# Altium PCB analogtestboard3.PCBDOC (part 1 of 3)
Units mil, origin at the board's own origin, x right, y up, seen from the top; angles counter-clockwise.
Board outline 10000 x 10000 mil, 4 copper layers (Top Layer, Internal Plane 1, Internal Plane 2, Bottom Layer); 448 components, 227 nets, 1474 pads, 451 vias.
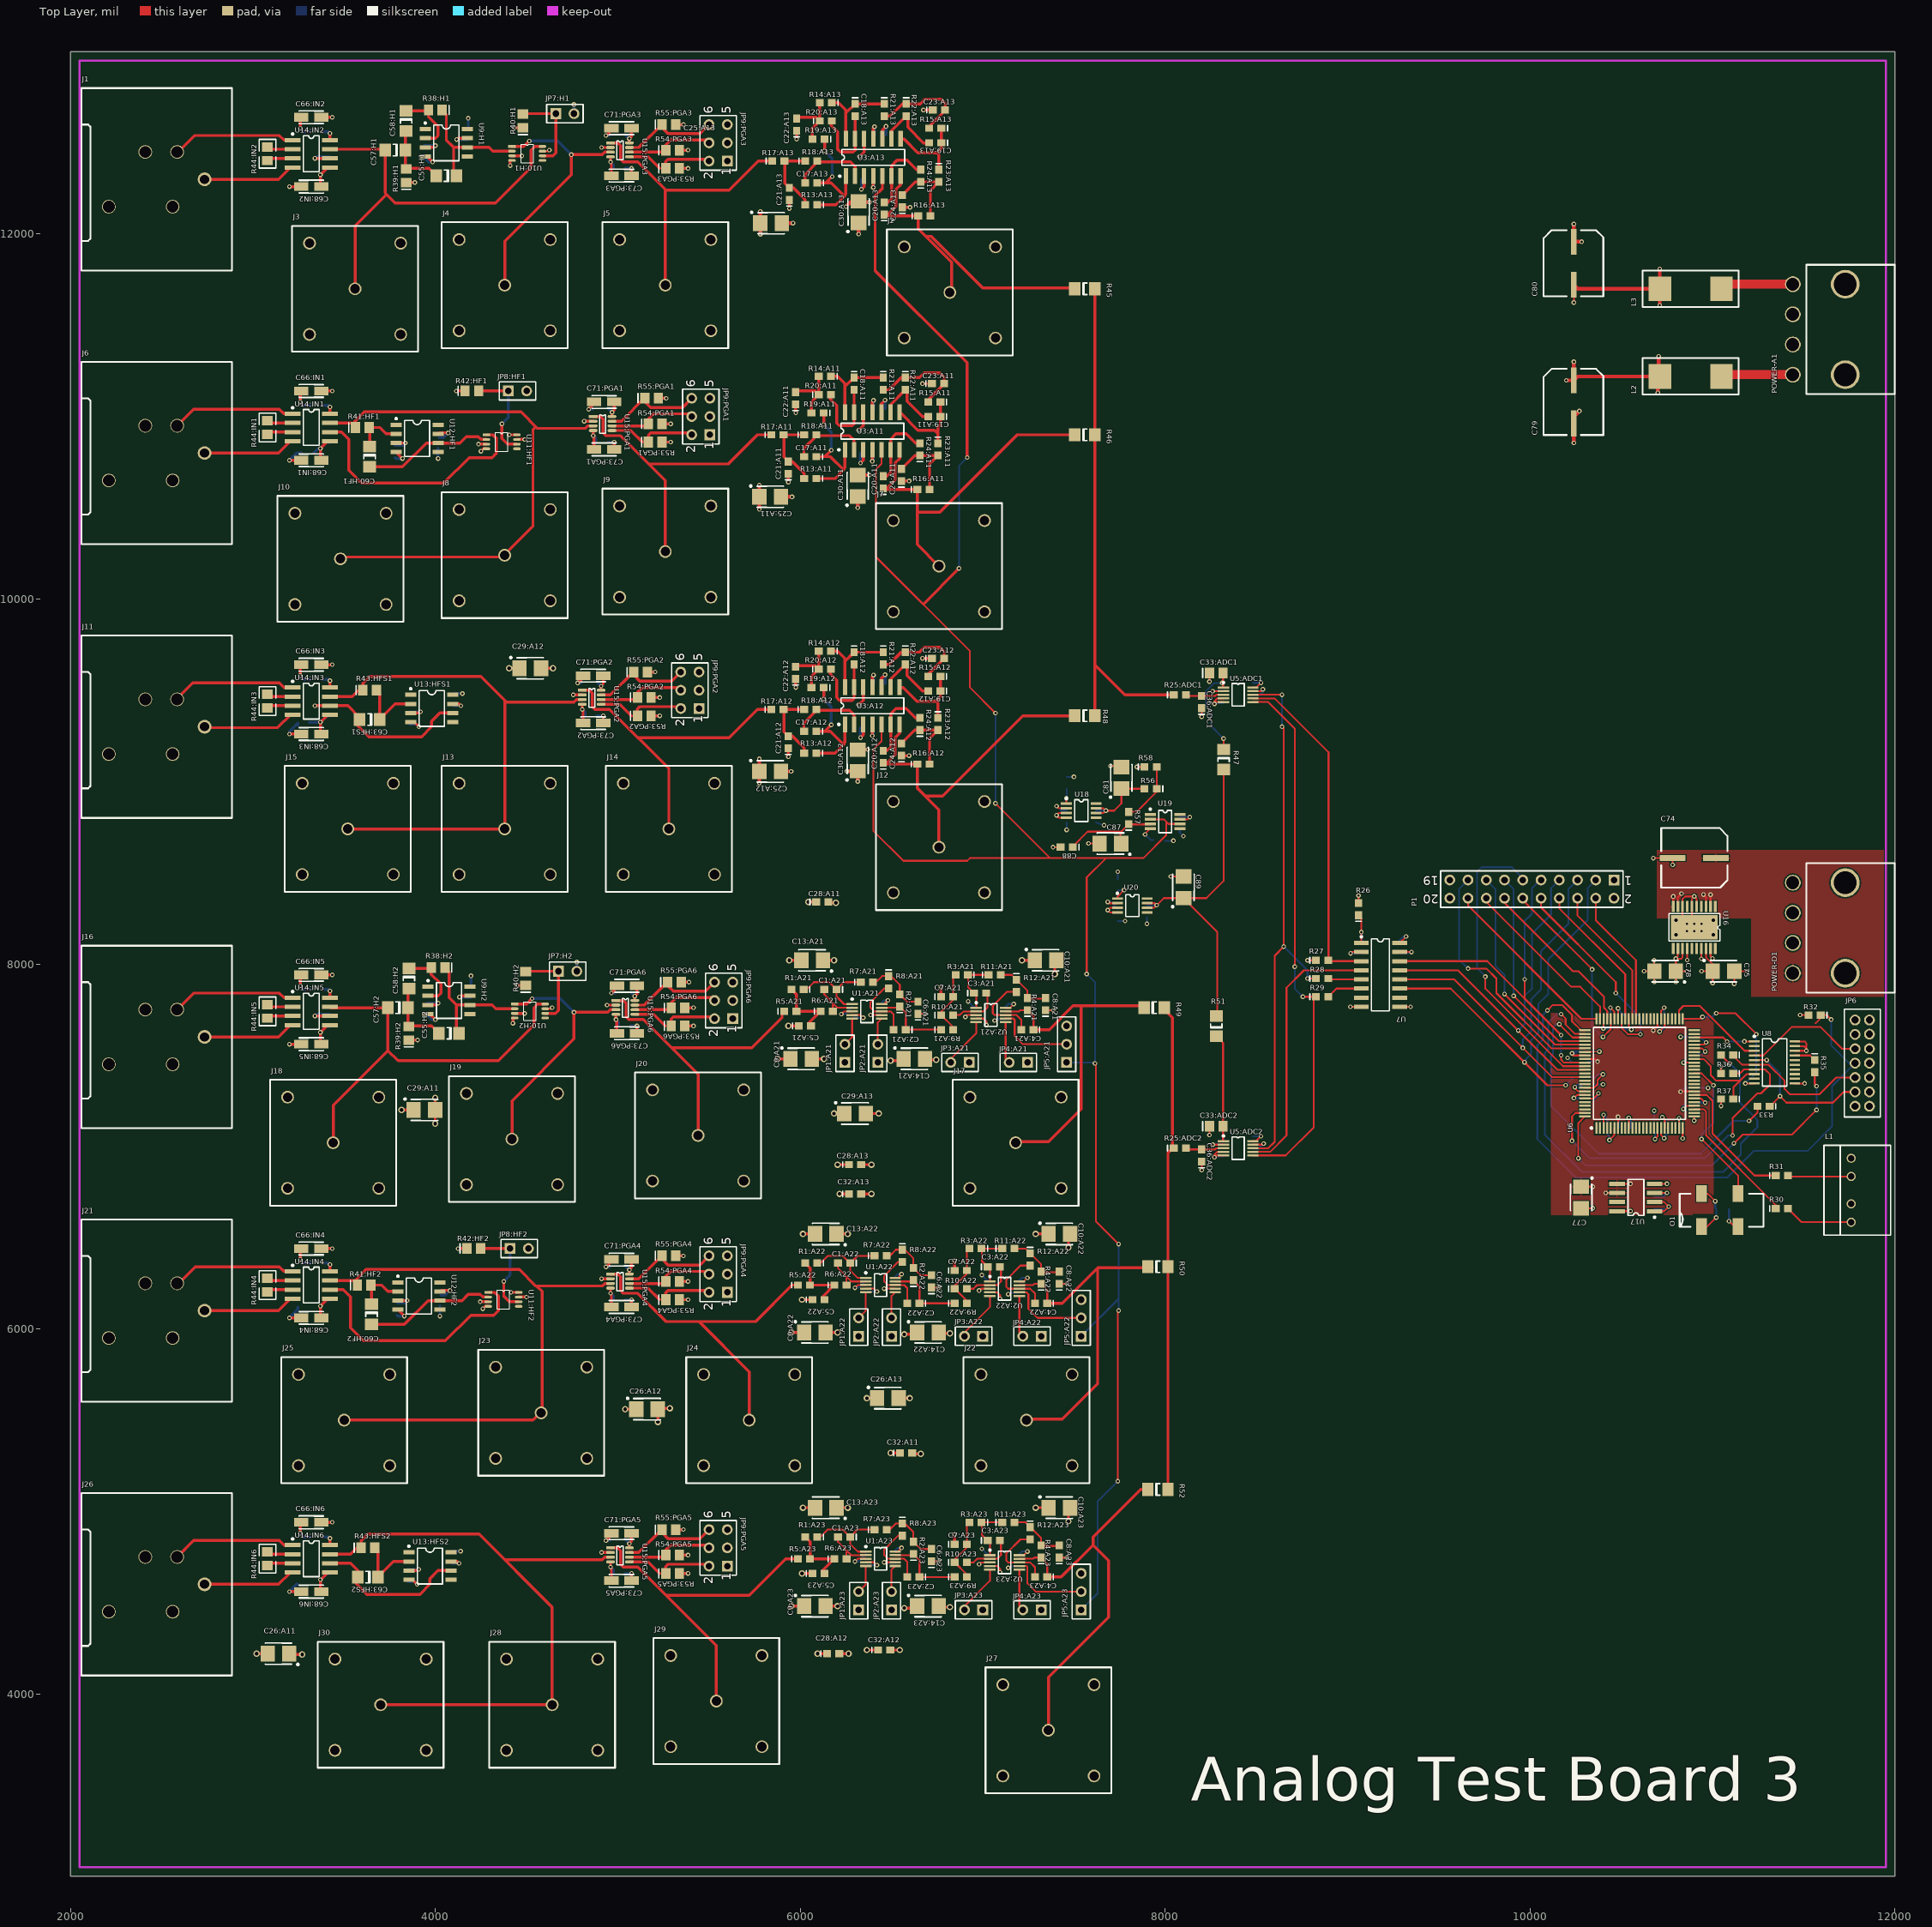
[diagram p0: Top Layer view]
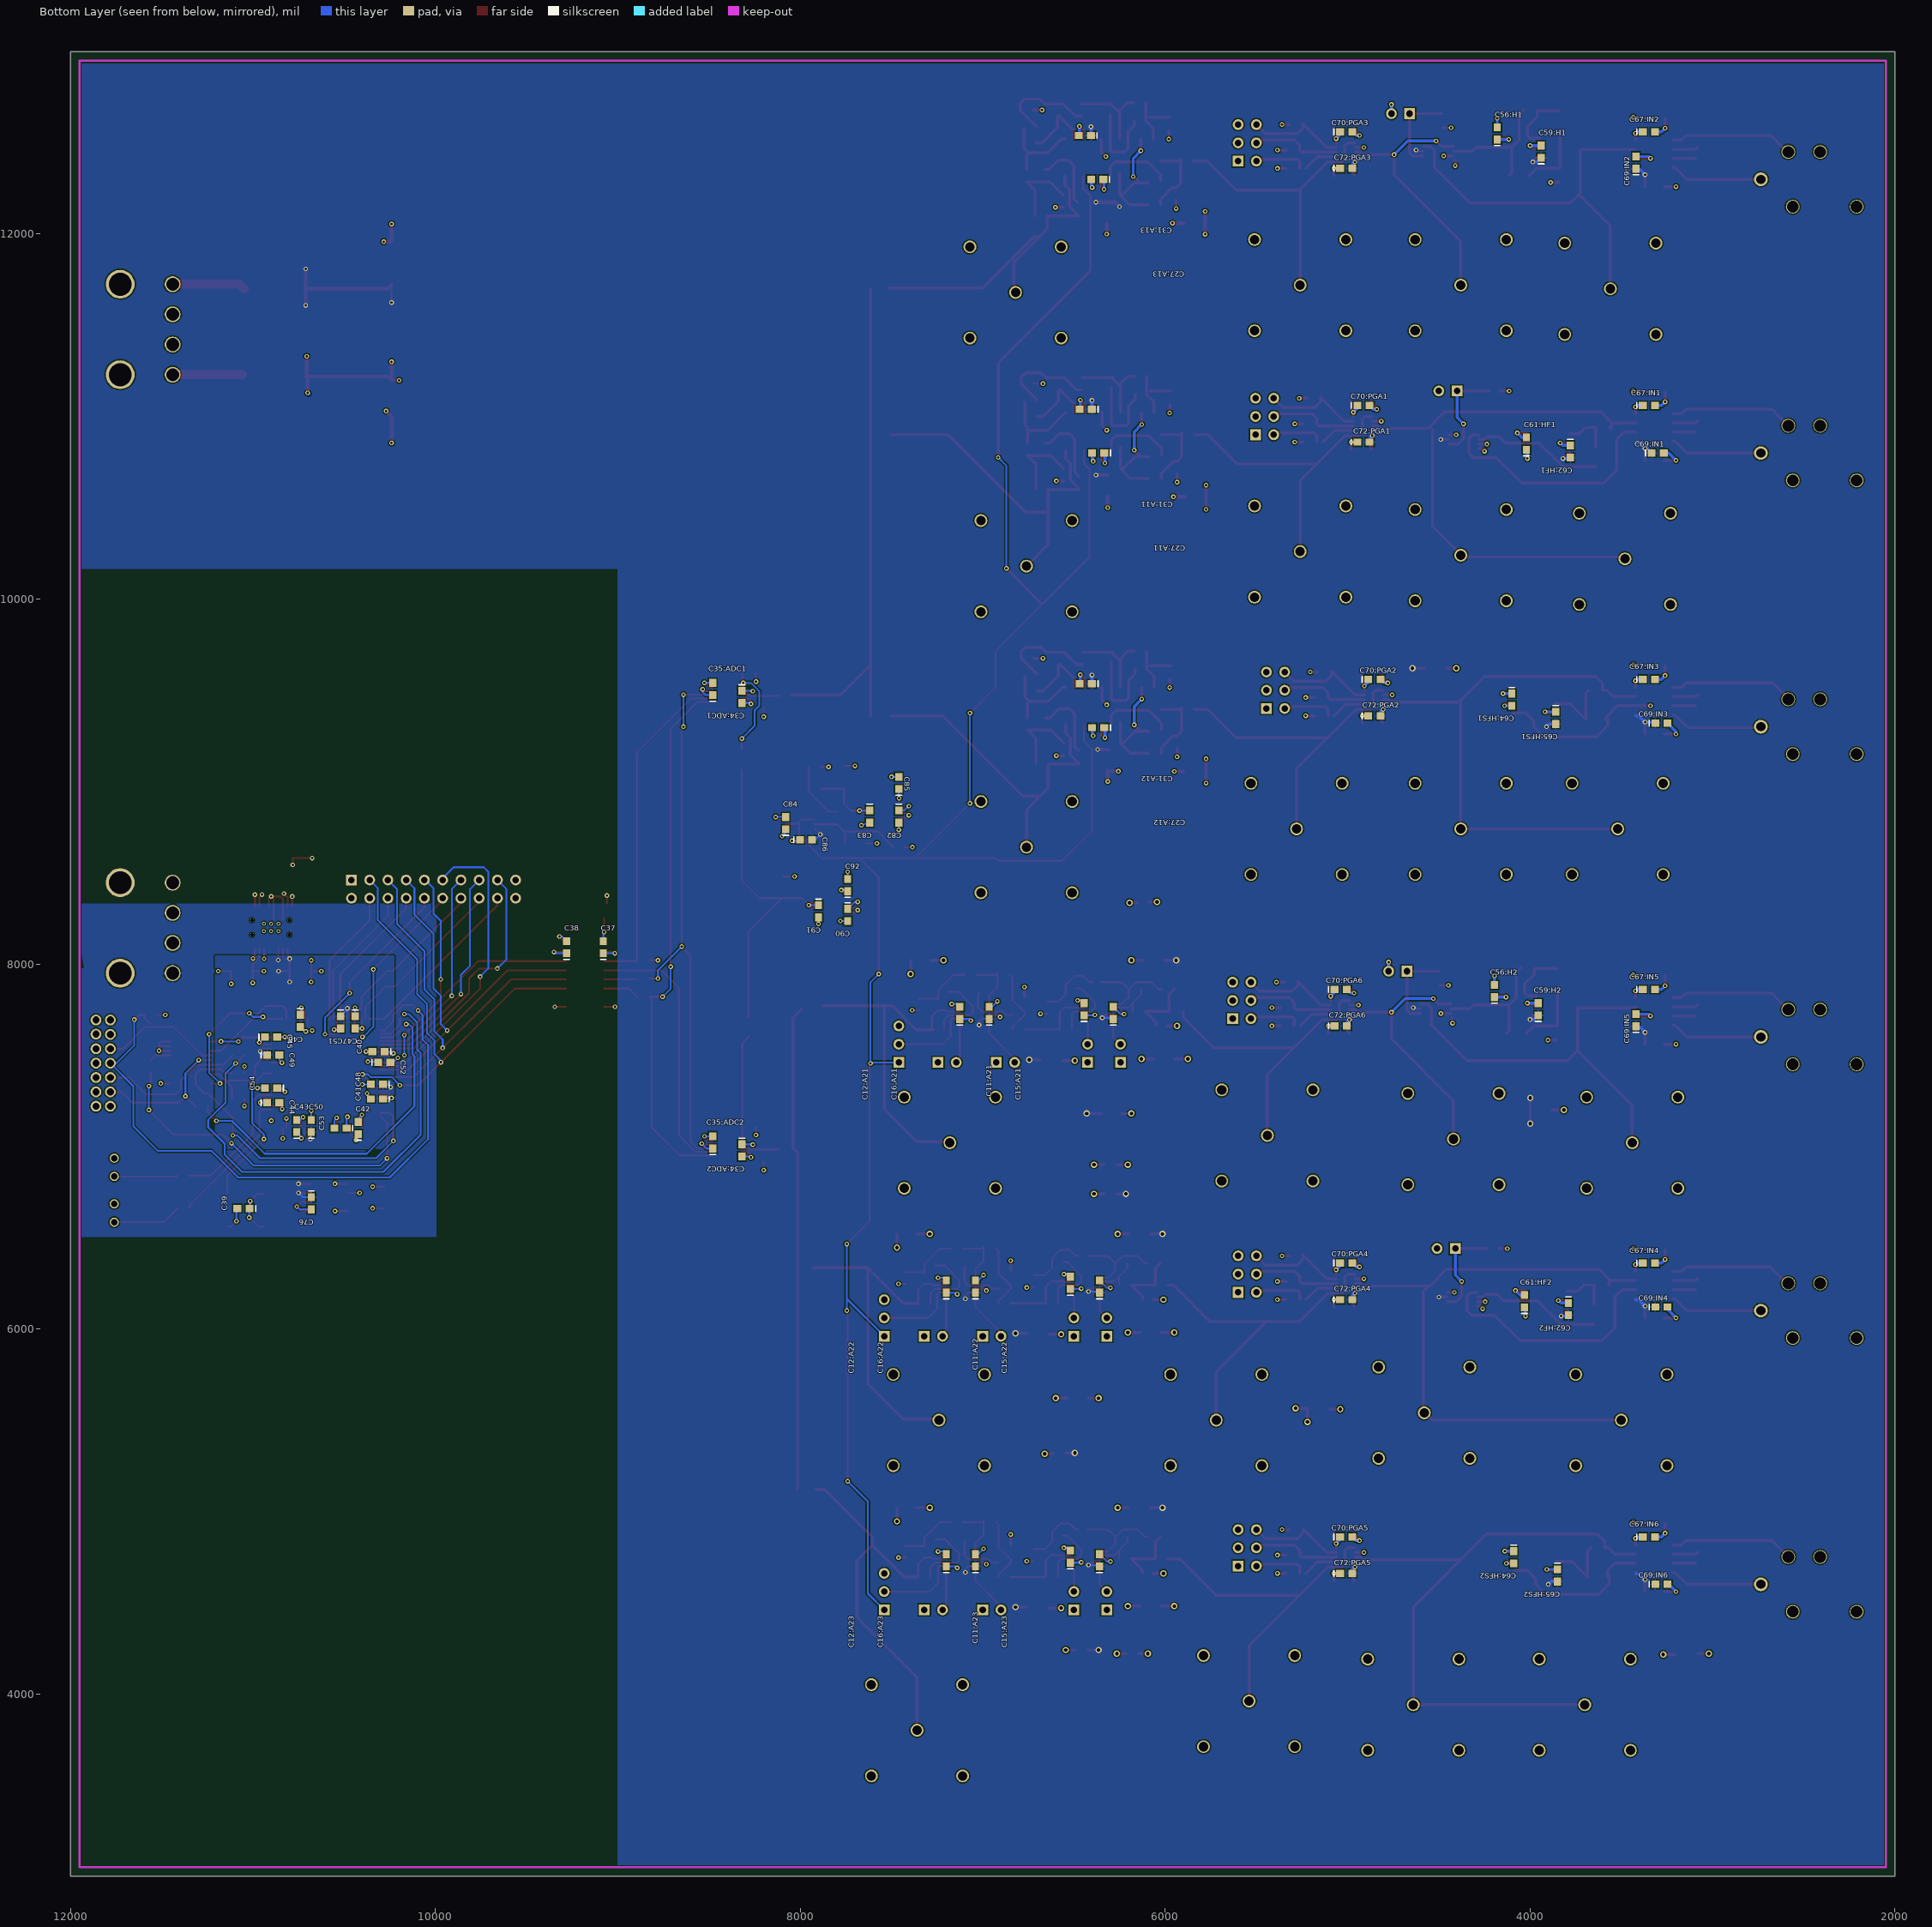
[diagram p1: Bottom Layer view, seen from below]
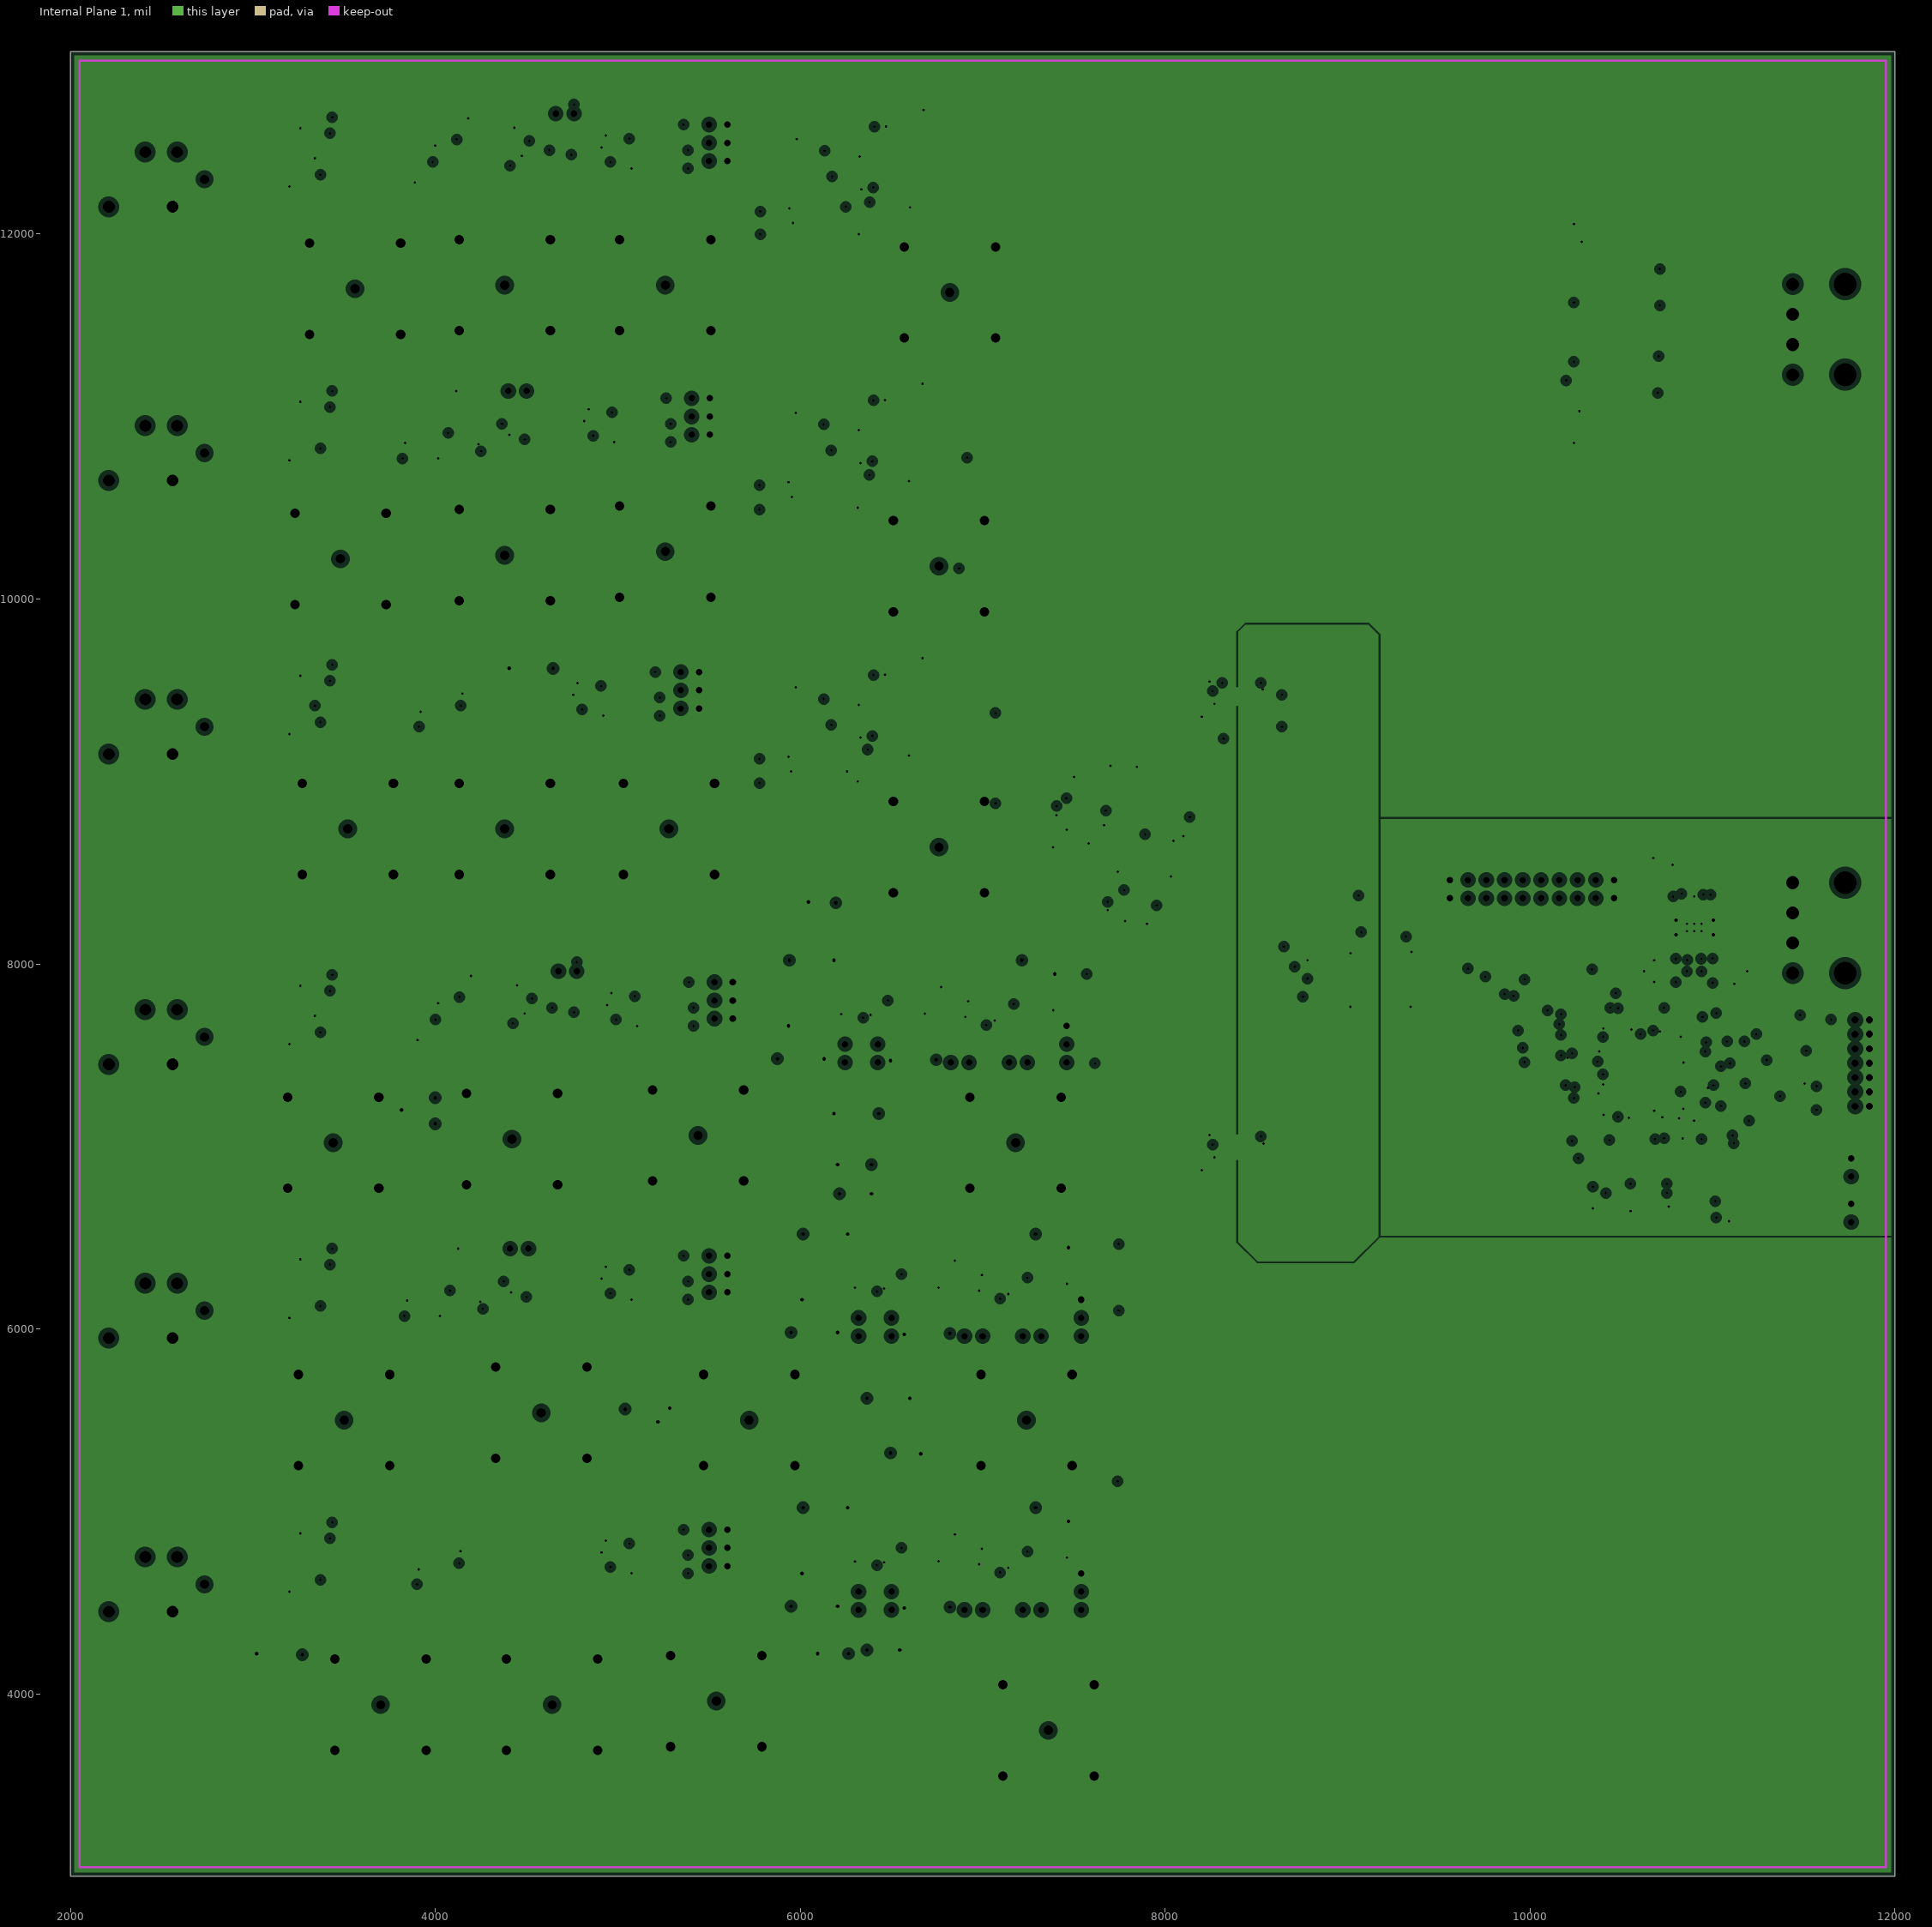
[diagram p2: Internal Plane 1, clearances drawn from the general rule]
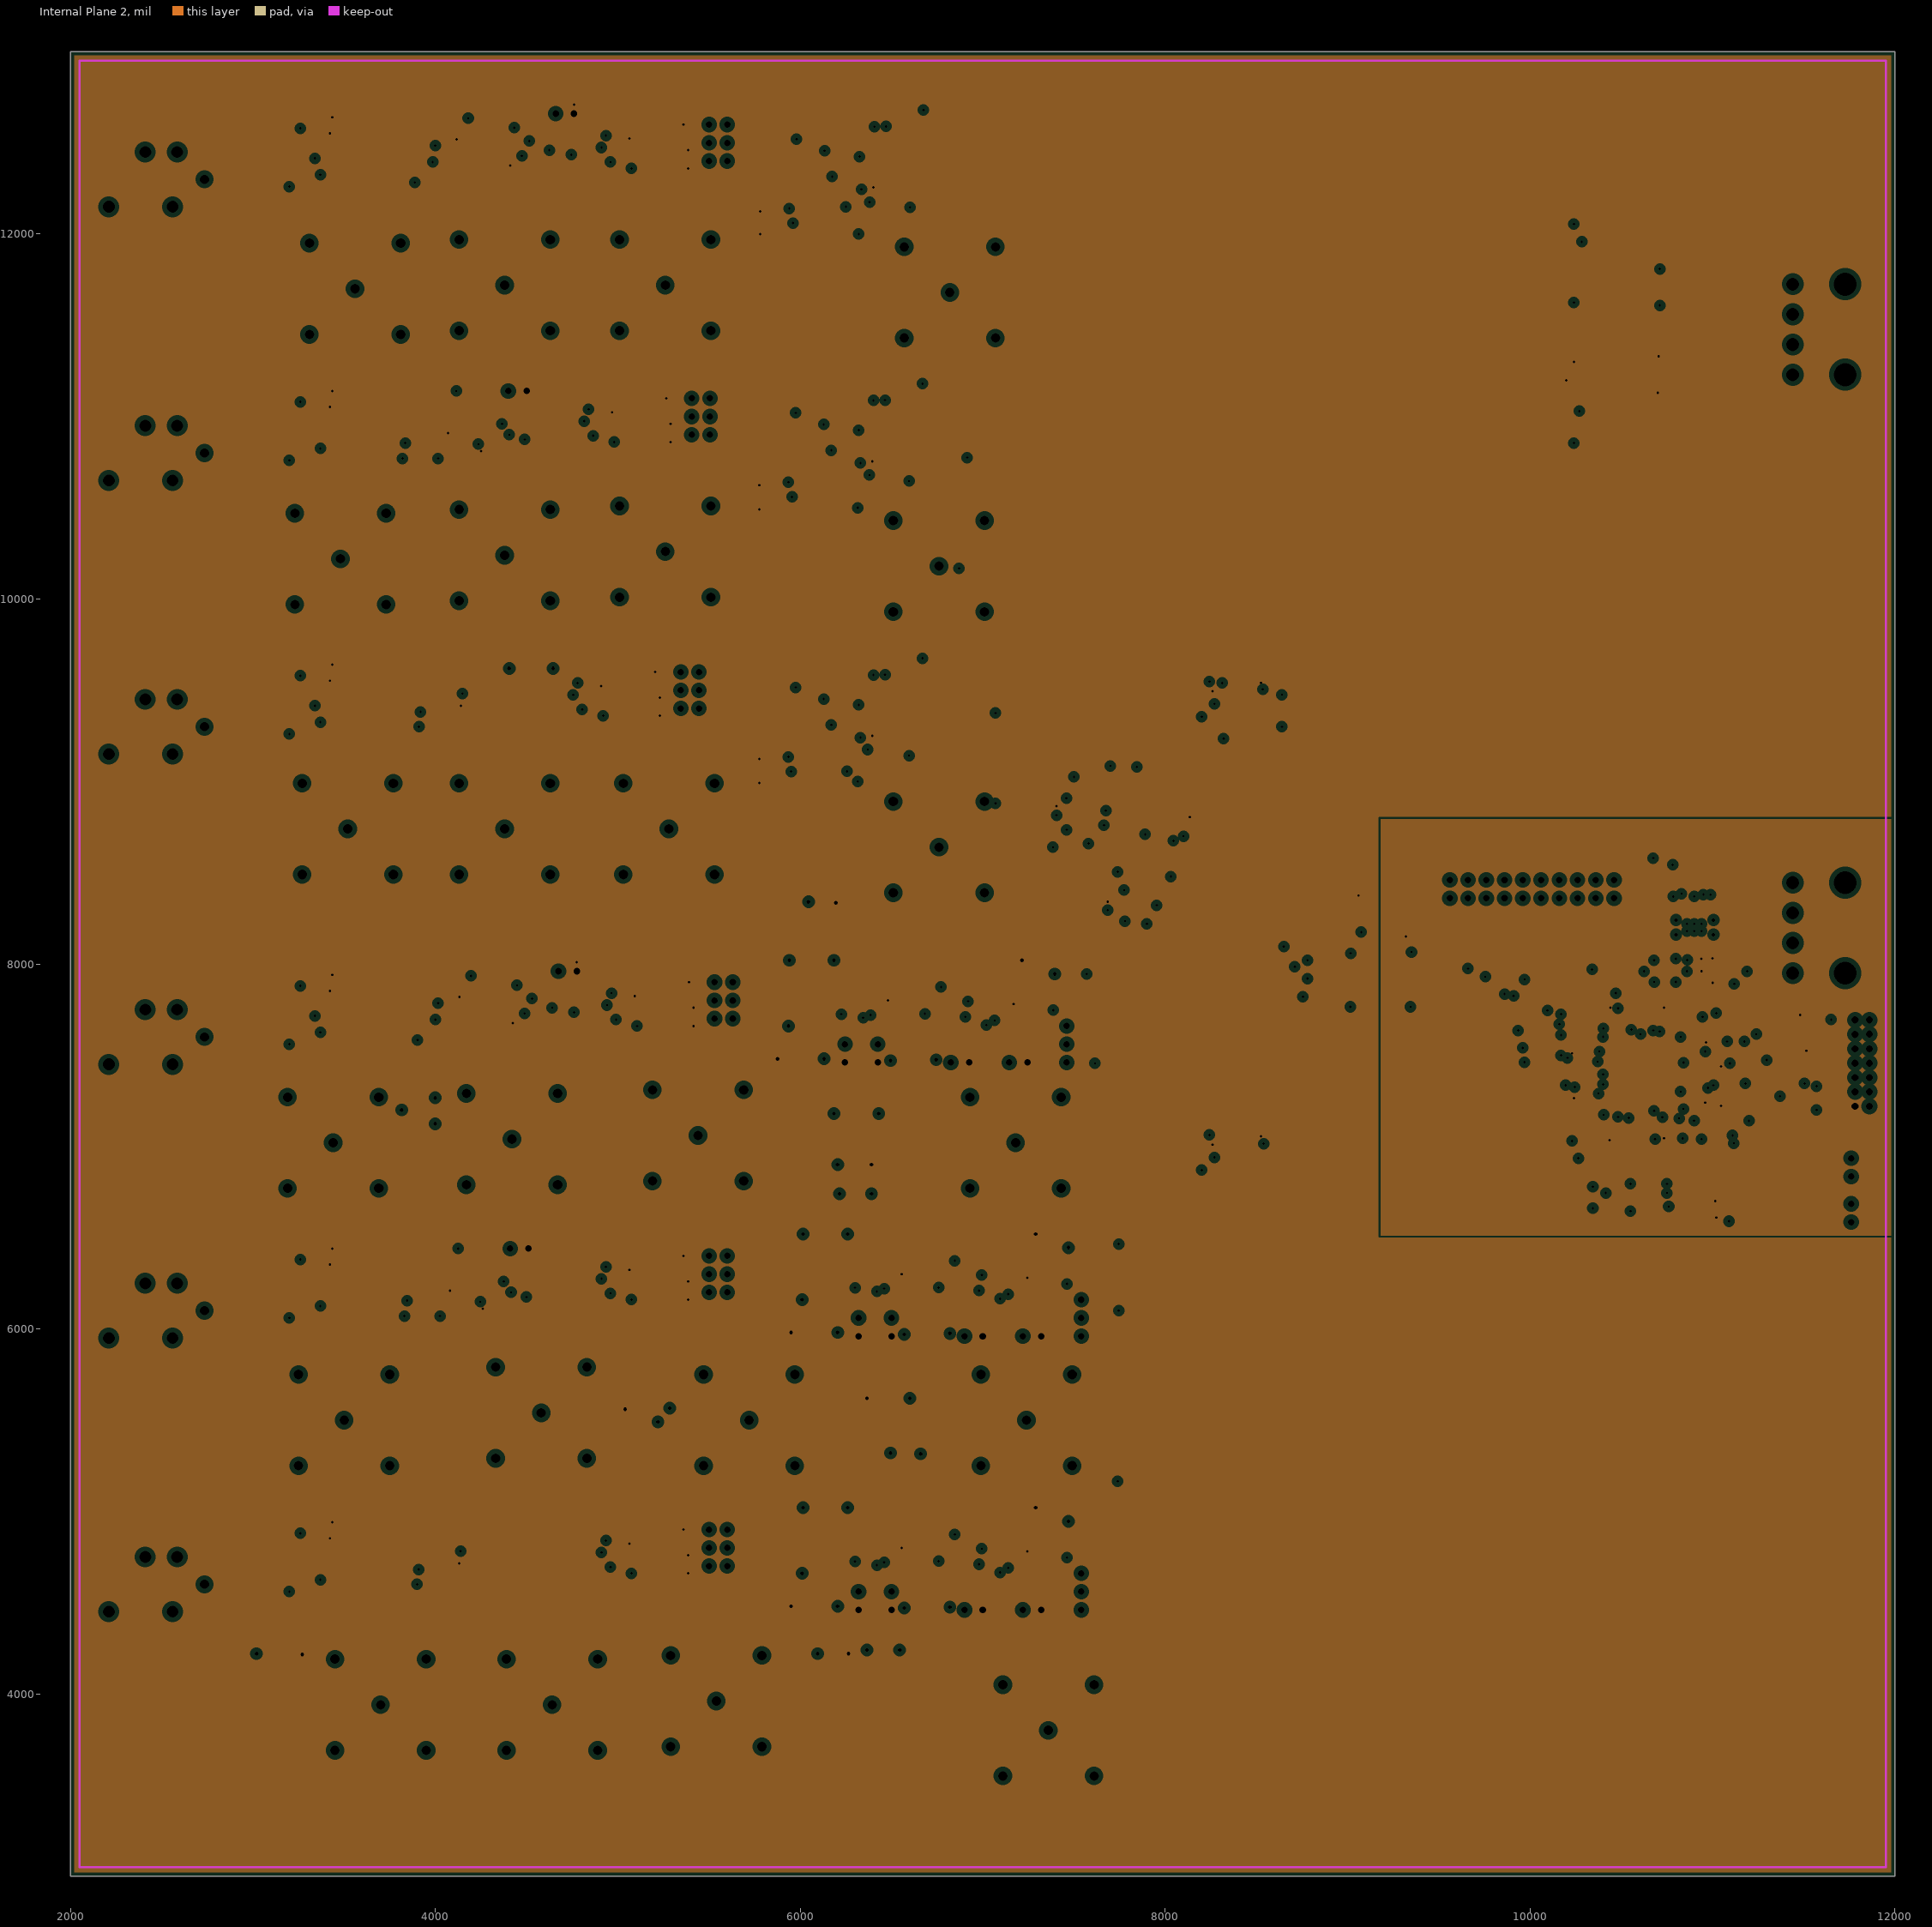
[diagram p3: Internal Plane 2, clearances drawn from the general rule]

## Layer stack, top to bottom
Top Layer: signal copper 1.4
Dielectric: core 12.6, FR-4, Dk 4.8
Internal Plane 1: plane copper 1.4, net (Multiple Nets)
Dielectric: prepreg 12.6, FR-4, Dk 4.8
Internal Plane 2: plane copper 1.4, net AVDD
Dielectric: core 12.6, FR-4, Dk 4.8
Bottom Layer: signal copper 1.4

## Board outline
2000,3000 12000,3000 12000,13000 2000,13000

## Design rules (kind name [scope] priority, off if disabled: settings)
Clearance [All] p1: gap=7
ComponentClearance [All] p1: gap=10 collisioncheckmode=0
HoleSize [All] p1: absolutevalues=TRUE maxlimit=300 minlimit=1 maxpercent=80.000 minpercent=20.000
PlaneClearance [All] p1: clearance=25
PlaneConnect [All] p1: planeconnectstyle=Relief reliefexpansion=20 reliefentries=4 reliefconductorwidth=15 reliefairgap=10
PolygonConnect [All] p1: connectstyle=Relief reliefconductorwidth=10 reliefentries=4 polygonreliefangle="90 Angle"
RoomDefinition A21 [InComponentClass('A21')] p1 off: confinementstyle=ConfineIn formatcopy=TRUE lockcomponents=FALSE outline 5825,7400 7525,7400 7525,8100 5825,8100
RoomDefinition HFS2 [InComponentClass('HFS2')] p2 off: confinementstyle=ConfineIn formatcopy=TRUE lockcomponents=FALSE outline 3520,4300 4580,4300 4580,5100 3520,5100
RoomDefinition HF2 [InComponentClass('HF2')] p3 off: confinementstyle=ConfineIn formatcopy=TRUE lockcomponents=FALSE outline 3515,5800 4575,5800 4575,6600 3515,6600
RoomDefinition H2 [InComponentClass('H2')] p4 off: confinementstyle=ConfineIn formatcopy=TRUE lockcomponents=FALSE outline 3525,7300 4900,7300 4900,8100 3525,8100
RoomDefinition A12 [InComponentClass('A12')] p5 off: confinementstyle=ConfineIn formatcopy=TRUE lockcomponents=FALSE outline 5730,8935 6880,8935 6880,9795 5730,9795
RoomDefinition A11 [InComponentClass('A11')] p6 off: confinementstyle=ConfineIn formatcopy=TRUE lockcomponents=FALSE outline 5730,10440 6880,10440 6880,11300 5730,11300
RoomDefinition PGA6 [InComponentClass('PGA6')] p7 off: confinementstyle=ConfineIn formatcopy=TRUE lockcomponents=FALSE outline 4930,7300 5735,7300 5735,8100 4930,8100
RoomDefinition PGA5 [InComponentClass('PGA5')] p8 off: confinementstyle=ConfineIn formatcopy=TRUE lockcomponents=FALSE outline 4900,4300 5705,4300 5705,5100 4900,5100
RoomDefinition PGA4 [InComponentClass('PGA4')] p9 off: confinementstyle=ConfineIn formatcopy=TRUE lockcomponents=FALSE outline 4900,5800 5705,5800 5705,6600 4900,6600
RoomDefinition PGA2 [InComponentClass('PGA2')] p10 off: confinementstyle=ConfineIn formatcopy=TRUE lockcomponents=FALSE outline 4745,9000 5550,9000 5550,9800 4745,9800
RoomDefinition IN6 [InComponentClass('IN6')] p11 off: confinementstyle=ConfineIn formatcopy=TRUE lockcomponents=FALSE outline 2900,4300 3490,4300 3490,5100 2900,5100
RoomDefinition IN5 [InComponentClass('IN5')] p12 off: confinementstyle=ConfineIn formatcopy=TRUE lockcomponents=FALSE outline 2900,7300 3490,7300 3490,8100 2900,8100
RoomDefinition IN4 [InComponentClass('IN4')] p13 off: confinementstyle=ConfineIn formatcopy=TRUE lockcomponents=FALSE outline 2900,5800 3490,5800 3490,6600 2900,6600
RoomDefinition IN3 [InComponentClass('IN3')] p14 off: confinementstyle=ConfineIn formatcopy=TRUE lockcomponents=FALSE outline 2900,9000 3490,9000 3490,9800 2900,9800
RoomDefinition IN1 [InComponentClass('IN1')] p15 off: confinementstyle=ConfineIn formatcopy=TRUE lockcomponents=FALSE outline 2900,10500 3490,10500 3490,11300 2900,11300
RoomDefinition A13 [InComponentClass('A13')] p16 off: confinementstyle=ConfineIn formatcopy=TRUE lockcomponents=FALSE outline 5735,11940 6885,11940 6885,12800 5735,12800
RoomDefinition A22 [InComponentClass('A22')] p17 off: confinementstyle=ConfineIn formatcopy=TRUE lockcomponents=FALSE outline 5900,5900 7600,5900 7600,6600 5900,6600
RoomDefinition A23 [InComponentClass('A23')] p18 off: confinementstyle=ConfineIn formatcopy=TRUE lockcomponents=FALSE outline 5900,4400 7600,4400 7600,5100 5900,5100
RoomDefinition ADC1 [InComponentClass('ADC1')] p19 off: confinementstyle=ConfineIn formatcopy=TRUE lockcomponents=FALSE outline 7975,9250 8575,9250 8575,9710 7975,9710
RoomDefinition ADC2 [InComponentClass('ADC2')] p20 off: confinementstyle=ConfineIn formatcopy=TRUE lockcomponents=FALSE outline 7975,6765 8575,6765 8575,7225 7975,7225
RoomDefinition FP [InComponentClass('FP')] p21 off: confinementstyle=ConfineIn formatcopy=TRUE lockcomponents=FALSE outline 8985,6505 11915,6505 11915,8645 8985,8645
RoomDefinition F [InComponentClass('F')] p22 off: confinementstyle=ConfineIn formatcopy=TRUE lockcomponents=FALSE outline 8960,6500 11900,6500 11900,8620 8960,8620
RoomDefinition H1 [InComponentClass('H1')] p23 off: confinementstyle=ConfineIn formatcopy=TRUE lockcomponents=FALSE outline 3510,12000 4885,12000 4885,12800 3510,12800
RoomDefinition HF1 [InComponentClass('HF1')] p24 off: confinementstyle=ConfineIn formatcopy=TRUE lockcomponents=FALSE outline 3505,10500 4565,10500 4565,11300 3505,11300
RoomDefinition HFS1 [InComponentClass('HFS1')] p25 off: confinementstyle=ConfineIn formatcopy=TRUE lockcomponents=FALSE outline 3530,9000 4590,9000 4590,9800 3530,9800
RoomDefinition IN2 [InComponentClass('IN2')] p26 off: confinementstyle=ConfineIn formatcopy=TRUE lockcomponents=FALSE outline 2900,12000 3490,12000 3490,12800 2900,12800
RoomDefinition main [InComponentClass('main')] p27 off: confinementstyle=ConfineIn formatcopy=TRUE lockcomponents=FALSE outline 2900,12950 2045,12950 2045,3050 2900,3050
RoomDefinition PGA1 [InComponentClass('PGA1')] p28 off: confinementstyle=ConfineIn formatcopy=TRUE lockcomponents=FALSE outline 4805,10500 5610,10500 5610,11300 4805,11300
RoomDefinition PGA3 [InComponentClass('PGA3')] p29 off: confinementstyle=ConfineIn formatcopy=TRUE lockcomponents=FALSE outline 4900,12000 5705,12000 5705,12800 4900,12800
RoomDefinition POW [InComponentClass('POW')] p30 off: confinementstyle=ConfineIn formatcopy=TRUE lockcomponents=FALSE outline 12000,12495 9745,12495 9745,6895 12000,6895
RoutingVias [All] p1: holewidth=13.5 width=25 viastyle="Through Hole" minholewidth=13.5 minwidth=25 maxholewidth=28 maxwidth=50
SolderMaskExpansion [All] p1: expansion=4
TestPointUsage [All] p1: valid=0 allowmultiple=FALSE
Testpoint [All] p1: side=15 testpointundercomponent=TRUE minsize=40 maxsize=100 preferedsize=60 minholesize=0 maxholesize=40 preferedholesize=32 testpointgrid=1 style=1023 order=-539222988
Width [All] p1: maxlimit=200 minlimit=7 preferedwidth=8 toplayer_prefwidth=16 bottomlayer_prefwidth=10 minimp=50.000000 maximp=50.000000 favimp=50.000000
14 further rules are at their usual default settings.

## Classes and differential pairs
channel class PGA: PGA1 PGA2 PGA3 PGA4 PGA5 PGA6
channel class input: IN1 IN2 IN3 IN4 IN5 IN6
channel class HPREF-NOSW: HFS1 HFS2
channel class HPFREF1: HF1 HF2
channel class HPF: H1 H2
channel class ADC: ADC1 ADC2
channel class AA8513: A11 A12 A13
channel class aa8028: A21 A22 A23
component class POW: C74 C75 C76 C77 C78 C79 C80 C81 C82 C83 C84 C85 C86 C87 C88 C89 C90 C91 C92 L2 L3 POWER-A1 POWER-D1 R56 R57 R58 U16 U17 U18 U19 U20
component class PGA6: C70:PGA6 C71:PGA6 C72:PGA6 C73:PGA6 JP9:PGA6 R53:PGA6 R54:PGA6 R55:PGA6 U15:PGA6
component class PGA5: C70:PGA5 C71:PGA5 C72:PGA5 C73:PGA5 JP9:PGA5 R53:PGA5 R54:PGA5 R55:PGA5 U15:PGA5
component class PGA4: C70:PGA4 C71:PGA4 C72:PGA4 C73:PGA4 JP9:PGA4 R53:PGA4 R54:PGA4 R55:PGA4 U15:PGA4
component class PGA3: C70:PGA3 C71:PGA3 C72:PGA3 C73:PGA3 JP9:PGA3 R53:PGA3 R54:PGA3 R55:PGA3 U15:PGA3
component class PGA2: C70:PGA2 C71:PGA2 C72:PGA2 C73:PGA2 JP9:PGA2 R53:PGA2 R54:PGA2 R55:PGA2 U15:PGA2
component class PGA1: C70:PGA1 C71:PGA1 C72:PGA1 C73:PGA1 JP9:PGA1 R53:PGA1 R54:PGA1 R55:PGA1 U15:PGA1
component class main: J1 J2 J3 J4 J5 J6 J7 J8 J9 J10 J11 J12 J13 J14 J15 J16 J17 J18 J19 J20 J21 J22 J23 J24 J25 J26 J27 J28 J29 J30 R45 R46 R47 R48 R49 R50 R51 R52
component class IN6: C66:IN6 C67:IN6 C68:IN6 C69:IN6 R44:IN6 U14:IN6
component class IN5: C66:IN5 C67:IN5 C68:IN5 C69:IN5 R44:IN5 U14:IN5
component class IN4: C66:IN4 C67:IN4 C68:IN4 C69:IN4 R44:IN4 U14:IN4
component class IN3: C66:IN3 C67:IN3 C68:IN3 C69:IN3 R44:IN3 U14:IN3
component class IN2: C66:IN2 C67:IN2 C68:IN2 C69:IN2 R44:IN2 U14:IN2
component class IN1: C66:IN1 C67:IN1 C68:IN1 C69:IN1 R44:IN1 U14:IN1
component class HFS2: C63:HFS2 C64:HFS2 C65:HFS2 R43:HFS2 U13:HFS2
component class HFS1: C63:HFS1 C64:HFS1 C65:HFS1 R43:HFS1 U13:HFS1
component class HF2: C60:HF2 C61:HF2 C62:HF2 JP8:HF2 R41:HF2 R42:HF2 U11:HF2 U12:HF2
component class HF1: C60:HF1 C61:HF1 C62:HF1 JP8:HF1 R41:HF1 R42:HF1 U11:HF1 U12:HF1
component class H2: C55:H2 C56:H2 C57:H2 C58:H2 C59:H2 JP7:H2 R38:H2 R39:H2 R40:H2 U9:H2 U10:H2
component class H1: C55:H1 C56:H1 C57:H1 C58:H1 C59:H1 JP7:H1 R38:H1 R39:H1 R40:H1 U9:H1 U10:H1
component class F: C37 C38 C39 L1 O1 P1 R26 R27 R28 R29 R30 R31 U6 U7
component class FP: C40 C41 C42 C43 C44 C45 C46 C47 C48 C49 C50 C51 C52 C53 C54 JP6 R32 R33 R34 R35 R36 R37 U8
component class ADC2: C33:ADC2 C34:ADC2 C35:ADC2 C36:ADC2 R25:ADC2 U5:ADC2
component class ADC1: C33:ADC1 C34:ADC1 C35:ADC1 C36:ADC1 R25:ADC1 U5:ADC1
component class A23: C1:A23 C2:A23 C3:A23 C4:A23 C5:A23 C6:A23 C7:A23 C8:A23 C9:A23 C10:A23 C11:A23 C12:A23 C13:A23 C14:A23 C15:A23 C16:A23 JP1:A23 JP2:A23 JP3:A23 JP4:A23 JP5:A23 R1:A23 R2:A23 R3:A23 R4:A23 R5:A23 R6:A23 R7:A23 R8:A23 R9:A23 R10:A23 R11:A23 R12:A23 U1:A23 U2:A23
component class A22: C1:A22 C2:A22 C3:A22 C4:A22 C5:A22 C6:A22 C7:A22 C8:A22 C9:A22 C10:A22 C11:A22 C12:A22 C13:A22 C14:A22 C15:A22 C16:A22 JP1:A22 JP2:A22 JP3:A22 JP4:A22 JP5:A22 R1:A22 R2:A22 R3:A22 R4:A22 R5:A22 R6:A22 R7:A22 R8:A22 R9:A22 R10:A22 R11:A22 R12:A22 U1:A22 U2:A22
component class A21: C1:A21 C2:A21 C3:A21 C4:A21 C5:A21 C6:A21 C7:A21 C8:A21 C9:A21 C10:A21 C11:A21 C12:A21 C13:A21 C14:A21 C15:A21 C16:A21 JP1:A21 JP2:A21 JP3:A21 JP4:A21 JP5:A21 R1:A21 R2:A21 R3:A21 R4:A21 R5:A21 R6:A21 R7:A21 R8:A21 R9:A21 R10:A21 R11:A21 R12:A21 U1:A21 U2:A21
component class A13: C17:A13 C18:A13 C19:A13 C20:A13 C21:A13 C22:A13 C23:A13 C24:A13 C25:A13 C26:A13 C27:A13 C28:A13 C29:A13 C30:A13 C31:A13 C32:A13 R13:A13 R14:A13 R15:A13 R16:A13 R17:A13 R18:A13 R19:A13 R20:A13 R21:A13 R22:A13 R23:A13 R24:A13 U3:A13
component class A12: C17:A12 C18:A12 C19:A12 C20:A12 C21:A12 C22:A12 C23:A12 C24:A12 C25:A12 C26:A12 C27:A12 C28:A12 C29:A12 C30:A12 C31:A12 C32:A12 R13:A12 R14:A12 R15:A12 R16:A12 R17:A12 R18:A12 R19:A12 R20:A12 R21:A12 R22:A12 R23:A12 R24:A12 U3:A12
component class A11: C17:A11 C18:A11 C19:A11 C20:A11 C21:A11 C22:A11 C23:A11 C24:A11 C25:A11 C26:A11 C27:A11 C28:A11 C29:A11 C30:A11 C31:A11 C32:A11 R13:A11 R14:A11 R15:A11 R16:A11 R17:A11 R18:A11 R19:A11 R20:A11 R21:A11 R22:A11 R23:A11 R24:A11 U3:A11

## Components (designator, comment, footprint, x,y, rotation, side; value= is the part's Value field where it differs from the comment)
C1:A21 "Cap" 0603 6165,7860 r180 top (schematic designator C1)
C1:A22 "Cap" 0603 6240,6360 r180 top (schematic designator C1)
C1:A23 "Cap" 0603 6240,4860 r180 top (schematic designator C1)
C2:A21 "Cap" 0603 6545,7640 r180 top (schematic designator C2)
C2:A22 "Cap" 0603 6620,6140 r180 top (schematic designator C2)
C2:A23 "Cap" 0603 6620,4640 r180 top (schematic designator C2)
C3:A21 "Cap" 0603 6985,7840 r0 top (schematic designator C3)
C3:A22 "Cap" 0603 7060,6340 r0 top (schematic designator C3)
C3:A23 "Cap" 0603 7060,4840 r0 top (schematic designator C3)
C4:A21 "Cap" 0603 7245,7640 r180 top (schematic designator C4)
C4:A22 "Cap" 0603 7320,6140 r180 top (schematic designator C4)
C4:A23 "Cap" 0603 7320,4640 r180 top (schematic designator C4)
C5:A21 "Cap" 0603 6025,7660 r0 top (schematic designator C5)
C5:A22 "Cap" 0603 6100,6160 r0 top (schematic designator C5)
C5:A23 "Cap" 0603 6100,4660 r0 top (schematic designator C5)
C6:A21 "Cap" 0603 6645,7760 r90 top (schematic designator C6)
C6:A22 "Cap" 0603 6720,6260 r90 top (schematic designator C6)
C6:A23 "Cap" 0603 6720,4760 r90 top (schematic designator C6)
C7:A21 "Cap" 0603 6805,7820 r0 top (schematic designator C7)
C7:A22 "Cap" 0603 6880,6320 r0 top (schematic designator C7)
C7:A23 "Cap" 0603 6880,4820 r0 top (schematic designator C7)
C8:A21 "Cap" 0603 7345,7780 r90 top (schematic designator C8)
C8:A22 "Cap" 0603 7420,6280 r90 top (schematic designator C8)
C8:A23 "Cap" 0603 7420,4780 r90 top (schematic designator C8)
C9:A21 "Cap Pol1" TC3528-1411 6005,7480 r0 top (schematic designator C9)
C9:A22 "Cap Pol1" TC3528-1411 6080,5980 r0 top (schematic designator C9)
C9:A23 "Cap Pol1" TC3528-1411 6080,4480 r0 top (schematic designator C9)
C10:A21 "Cap Pol1" TC3528-1411 7345,8020 r0 top (schematic designator C10)
C10:A22 "Cap Pol1" TC3528-1411 7420,6520 r0 top (schematic designator C10)
C10:A23 "Cap Pol1" TC3528-1411 7420,5020 r0 top (schematic designator C10)
C11:A21 "Cap" CC1608-0603 6445,7751.75 r90 bottom (schematic designator C11)
C11:A22 "Cap" CC1608-0603 6520,6251.75 r90 bottom (schematic designator C11)
C11:A23 "Cap" CC1608-0603 6520,4751.75 r90 bottom (schematic designator C11)
C12:A21 "Cap" CC1608-0603 7125,7731.75 r90 bottom (schematic designator C12)
C12:A22 "Cap" CC1608-0603 7200,6231.75 r90 bottom (schematic designator C12)
C12:A23 "Cap" CC1608-0603 7200,4731.75 r90 bottom (schematic designator C12)
C13:A21 "Cap Pol1" TC3528-1411 6065,8020 r180 top (schematic designator C13)
C13:A22 "Cap Pol1" TC3528-1411 6140,6520 r180 top (schematic designator C13)
C13:A23 "Cap Pol1" TC3528-1411 6140,5020 r180 top (schematic designator C13)
C14:A21 "Cap Pol1" TC3528-1411 6625,7480 r0 top (schematic designator C14)
C14:A22 "Cap Pol1" TC3528-1411 6700,5980 r0 top (schematic designator C14)
C14:A23 "Cap Pol1" TC3528-1411 6700,4480 r0 top (schematic designator C14)
C15:A21 "Cap" CC1608-0603 6285,7731.75 r90 bottom (schematic designator C15)
C15:A22 "Cap" CC1608-0603 6360,6231.75 r90 bottom (schematic designator C15)
C15:A23 "Cap" CC1608-0603 6360,4731.75 r90 bottom (schematic designator C15)
C16:A21 "Cap" CC1608-0603 6965,7731.75 r90 bottom (schematic designator C16)
C16:A22 "Cap" CC1608-0603 7040,6231.75 r90 bottom (schematic designator C16)
C16:A23 "Cap" CC1608-0603 7040,4731.75 r90 bottom (schematic designator C16)
C17:A11 "Cap" CC1608-0603 6055,10780 r180 top (schematic designator C17)
C17:A12 "Cap" CC1608-0603 6055,9275 r180 top (schematic designator C17)
C17:A13 "Cap" CC1608-0603 6060,12280 r180 top (schematic designator C17)
C18:A11 "Cap" CC1608-0603 6295,11180 r270 top (schematic designator C18)
C18:A12 "Cap" CC1608-0603 6295,9675 r270 top (schematic designator C18)
C18:A13 "Cap" CC1608-0603 6300,12680 r270 top (schematic designator C18)
C19:A11 "Cap" CC1608-0603 6735,11000 r180 top (schematic designator C19)
C19:A12 "Cap" CC1608-0603 6735,9495 r180 top (schematic designator C19)
C19:A13 "Cap" CC1608-0603 6740,12500 r180 top (schematic designator C19)
C20:A11 "Cap" CC1608-0603 6455,10640 r90 top (schematic designator C20)
C20:A12 "Cap" CC1608-0603 6455,9135 r90 top (schematic designator C20)
C20:A13 "Cap" CC1608-0603 6460,12140 r90 top (schematic designator C20)
C21:A11 "Cap" CC1608-0603 5935,10720 r90 top (schematic designator C21)
C21:A12 "Cap" CC1608-0603 5935,9215 r90 top (schematic designator C21)
C21:A13 "Cap" CC1608-0603 5940,12220 r90 top (schematic designator C21)
C22:A11 "Cap" CC1608-0603 5975,11100 r90 top (schematic designator C22)
C22:A12 "Cap" CC1608-0603 5975,9595 r90 top (schematic designator C22)
C22:A13 "Cap" CC1608-0603 5980,12600 r90 top (schematic designator C22)
C23:A11 "Cap" CC1608-0603 6755,11180 r0 top (schematic designator C23)
C23:A12 "Cap" CC1608-0603 6755,9675 r0 top (schematic designator C23)
C23:A13 "Cap" CC1608-0603 6760,12680 r0 top (schematic designator C23)
C24:A11 "Cap" CC1608-0603 6555,10680 r90 top (schematic designator C24)
C24:A12 "Cap" CC1608-0603 6555,9175 r90 top (schematic designator C24)
C24:A13 "Cap" CC1608-0603 6560,12180 r90 top (schematic designator C24)
C25:A11 "Cap Pol1" TC3528-1411 5835,10560 r0 top (schematic designator C25)
C25:A12 "Cap Pol1" TC3528-1411 5835,9055 r0 top (schematic designator C25)
C25:A13 "Cap Pol1" TC3528-1411 5840,12060 r0 top (schematic designator C25)
C26:A11 "Cap Pol1" TC3528-1411 3140,4220 r180 top (schematic designator C26)
C26:A12 "Cap Pol1" TC3528-1411 5160,5560 r0 top (schematic designator C26)
C26:A13 "Cap Pol1" TC3528-1411 6480,5620 r0 top (schematic designator C26)
C27:A11 "Cap" CC1608-0603 6366.75,10800 r0 bottom (schematic designator C27)
C27:A12 "Cap" CC1608-0603 6366.75,9295 r0 bottom (schematic designator C27)
C27:A13 "Cap" CC1608-0603 6371.75,12300 r0 bottom (schematic designator C27)
C28:A11 "Cap" CC1608-0603 6120,8340 r0 top (schematic designator C28)
C28:A12 "Cap" CC1608-0603 6180,4220 r0 top (schematic designator C28)
C28:A13 "Cap" CC1608-0603 6300,6900 r0 top (schematic designator C28)
C29:A11 "Cap Pol1" TC3528-1411 3940,7200 r0 top (schematic designator C29)
C29:A12 "Cap Pol1" TC3528-1411 4520,9620 r0 top (schematic designator C29)
C29:A13 "Cap Pol1" TC3528-1411 6300,7180 r0 top (schematic designator C29)
C30:A11 "Cap Pol1" TC3528-1411 6315,10620 r90 top (schematic designator C30)
C30:A12 "Cap Pol1" TC3528-1411 6315,9115 r90 top (schematic designator C30)
C30:A13 "Cap Pol1" TC3528-1411 6320,12120 r90 top (schematic designator C30)
C31:A11 "Cap" CC1608-0603 6435,11040 r0 bottom (schematic designator C31)
C31:A12 "Cap" CC1608-0603 6435,9535 r0 bottom (schematic designator C31)
C31:A13 "Cap" CC1608-0603 6440,12540 r0 bottom (schematic designator C31)
C32:A11 "Cap" CC1608-0603 6580,5320 r0 top (schematic designator C32)
C32:A12 "Cap" CC1608-0603 6460,4240 r0 top (schematic designator C32)
C32:A13 "Cap" CC1608-0603 6300,6740 r0 top (schematic designator C32)
C33:ADC1 "Ceramic" 0805 8280,9595 r0 top (schematic designator C33)
C33:ADC2 "Ceramic" 0805 8280,7110 r0 top (schematic designator C33)
C34:ADC1 "Cap" 0603 8320,9463.25 r270 bottom (schematic designator C34)
C34:ADC2 "Cap" 0603 8320,6978.25 r270 bottom (schematic designator C34)
C35:ADC1 "Ceramic" 0603 8480,9506.75 r90 bottom (schematic designator C35)
C35:ADC2 "Ceramic" 0603 8480,7021.75 r90 bottom (schematic designator C35)
C36:ADC1 "Cap" 0603 8200,9435 r90 top (schematic designator C36)
C36:ADC2 "Cap" 0603 8200,6950 r90 top (schematic designator C36)
C37 "Cap" CC1608-0603 9080,8091.75 r90 bottom
C38 "Cap" CC1608-0603 9280,8091.75 r90 bottom
C39 "Cap" CC1608-0603 11051.75,6660 r0 bottom
C40 "Cap" CC1608-0603 10311.75,7520 r0 bottom
C41 "Cap" CC1608-0603 10320,7260 r0 bottom
C42 "Cap" CC1608-0603 10422.83,7100.79 r90 bottom
C43 "Cap" CC1608-0603 10760,7111.75 r90 bottom
C44 "Cap" CC1608-0603 10888.25,7240 r180 bottom
C45 "Cap" CC1608-0603 10900,7600 r180 bottom
C46 "Cap" CC1608-0603 10740,7688.25 r270 bottom
C47 "Cap" CC1608-0603 10440,7680 r270 bottom
C48 "Cap" CC1608-0603 10320,7340 r0 bottom
C49 "Cap" CC1608-0603 10888.25,7500 r180 bottom
C50 "Cap" CC1608-0603 10680,7111.75 r90 bottom
C51 "Cap" CC1608-0603 10520,7680 r270 bottom
C52 "Cap" CC1608-0603 10280,7460 r180 bottom
C53 "Cap" CC1608-0603 10520,7100 r0 bottom
C54 "Cap" CC1608-0603 10900,7320 r0 bottom
C55:H1 "Cap" CC3216-1206 4060,12320 r180 top (schematic designator C55)
C55:H2 "Cap" CC3216-1206 4075,7620 r180 top (schematic designator C55)
C56:H1 "Cap" CC1608-0603 4180,12551.75 r90 bottom (schematic designator C56)
C56:H2 "Cap" CC1608-0603 4195,7851.75 r90 bottom (schematic designator C56)
C57:H1 "Cap" CC3216-1206 3780,12460 r180 top (schematic designator C57)
C57:H2 "Cap" CC3216-1206 3795,7760 r180 top (schematic designator C57)
C58:H1 "Cap" CC3216-1206 3840,12620 r270 top (schematic designator C58)
C58:H2 "Cap" CC3216-1206 3855,7920 r270 top (schematic designator C58)
C59:H1 "Cap" CC1608-0603 3940,12451.75 r90 bottom (schematic designator C59)
C59:H2 "Cap" CC1608-0603 3955,7751.75 r90 bottom (schematic designator C59)
C60:HF1 "Cap" CC3216-1206 3640,10780 r270 top (schematic designator C60)
C60:HF2 "Cap" CC3216-1206 3650,6080 r270 top (schematic designator C60)
C61:HF1 "Cap" CC1608-0603 4020,10851.75 r90 bottom (schematic designator C61)
C61:HF2 "Cap" CC1608-0603 4030,6151.75 r90 bottom (schematic designator C61)
C62:HF1 "Cap" CC1608-0603 3780,10808.25 r270 bottom (schematic designator C62)
C62:HF2 "Cap" CC1608-0603 3790,6108.25 r270 bottom (schematic designator C62)
C63:HFS1 "Cap" CC3216-1206 3640,9340 r180 top (schematic designator C63)
C63:HFS2 "Cap" CC3216-1206 3630,4640 r180 top (schematic designator C63)
C64:HFS1 "Cap" CC1608-0603 4100,9448.25 r270 bottom (schematic designator C64)
C64:HFS2 "Cap" CC1608-0603 4090,4748.25 r270 bottom (schematic designator C64)
C65:HFS1 "Cap" CC1608-0603 3860,9348.25 r270 bottom (schematic designator C65)
C65:HFS2 "Cap" CC1608-0603 3850,4648.25 r270 bottom (schematic designator C65)
C66:IN1 "Cap Pol3" TC3216-1206 3320,11140 r180 top (schematic designator C66)
C66:IN2 "Cap Pol3" TC3216-1206 3320,12640 r180 top (schematic designator C66)
C66:IN3 "Cap Pol3" TC3216-1206 3320,9640 r180 top (schematic designator C66)
C66:IN4 "Cap Pol3" TC3216-1206 3320,6440 r180 top (schematic designator C66)
C66:IN5 "Cap Pol3" TC3216-1206 3320,7940 r180 top (schematic designator C66)
C66:IN6 "Cap Pol3" TC3216-1206 3320,4940 r180 top (schematic designator C66)
C67:IN1 "Cap" CC1608-0603 3348.25,11060 r180 bottom (schematic designator C67)
C67:IN2 "Cap" CC1608-0603 3348.25,12560 r180 bottom (schematic designator C67)
C67:IN3 "Cap" CC1608-0603 3348.25,9560 r180 bottom (schematic designator C67)
C67:IN4 "Cap" CC1608-0603 3348.25,6360 r180 bottom (schematic designator C67)
C67:IN5 "Cap" CC1608-0603 3348.25,7860 r180 bottom (schematic designator C67)
C67:IN6 "Cap" CC1608-0603 3348.25,4860 r180 bottom (schematic designator C67)
C68:IN1 "Cap Pol3" TC3216-1206 3320,10760 r0 top (schematic designator C68)
C68:IN2 "Cap Pol3" TC3216-1206 3320,12260 r0 top (schematic designator C68)
C68:IN3 "Cap Pol3" TC3216-1206 3320,9260 r0 top (schematic designator C68)
C68:IN4 "Cap Pol3" TC3216-1206 3320,6060 r0 top (schematic designator C68)
C68:IN5 "Cap Pol3" TC3216-1206 3320,7560 r0 top (schematic designator C68)
C68:IN6 "Cap Pol3" TC3216-1206 3320,4560 r0 top (schematic designator C68)
C69:IN1 "Cap" CC1608-0603 3300,10800 r180 bottom (schematic designator C69)
C69:IN2 "Cap" CC1608-0603 3420,12391.75 r90 bottom (schematic designator C69)
C69:IN3 "Cap" CC1608-0603 3280,9320 r180 bottom (schematic designator C69)
C69:IN4 "Cap" CC1608-0603 3280,6120 r180 bottom (schematic designator C69)
C69:IN5 "Cap" CC1608-0603 3420,7691.75 r90 bottom (schematic designator C69)
C69:IN6 "Cap" CC1608-0603 3280,4600 r180 bottom (schematic designator C69)
C70:PGA1 "Cap" CC1608-0603 4913.25,11060 r180 bottom (schematic designator C70)
C70:PGA2 "Cap" CC1608-0603 4853.25,9560 r180 bottom (schematic designator C70)
C70:PGA3 "Cap" CC1608-0603 5008.25,12560 r180 bottom (schematic designator C70)
C70:PGA4 "Cap" CC1608-0603 5008.25,6360 r180 bottom (schematic designator C70)
C70:PGA5 "Cap" CC1608-0603 5008.25,4860 r180 bottom (schematic designator C70)
C70:PGA6 "Cap" CC1608-0603 5038.25,7860 r180 bottom (schematic designator C70)
C71:PGA1 "Tantalum" TC3216-1206 4925,11080 r180 top (schematic designator C71)
C71:PGA2 "Tantalum" TC3216-1206 4865,9580 r180 top (schematic designator C71)
C71:PGA3 "Tantalum" TC3216-1206 5020,12580 r180 top (schematic designator C71)
C71:PGA4 "Tantalum" TC3216-1206 5020,6380 r180 top (schematic designator C71)
C71:PGA5 "Tantalum" TC3216-1206 5020,4880 r180 top (schematic designator C71)
C71:PGA6 "Tantalum" TC3216-1206 5050,7880 r180 top (schematic designator C71)
C72:PGA1 "Cap" CC1608-0603 4913.25,10860 r180 bottom (schematic designator C72)
C72:PGA2 "Cap" CC1608-0603 4853.25,9360 r180 bottom (schematic designator C72)
C72:PGA3 "Cap" CC1608-0603 5008.25,12360 r180 bottom (schematic designator C72)
C72:PGA4 "Cap" CC1608-0603 5008.25,6160 r180 bottom (schematic designator C72)
C72:PGA5 "Cap" CC1608-0603 5008.25,4660 r180 bottom (schematic designator C72)
C72:PGA6 "Cap" CC1608-0603 5038.25,7660 r180 bottom (schematic designator C72)
C73:PGA1 "Tantalum" TC3216-1206 4925,10820 r180 top (schematic designator C73)
C73:PGA2 "Tantalum" TC3216-1206 4865,9320 r180 top (schematic designator C73)
C73:PGA3 "Tantalum" TC3216-1206 5020,12320 r180 top (schematic designator C73)
C73:PGA4 "Tantalum" TC3216-1206 5020,6120 r180 top (schematic designator C73)
C73:PGA5 "Tantalum" TC3216-1206 5020,4620 r180 top (schematic designator C73)
C73:PGA6 "Tantalum" TC3216-1206 5050,7620 r180 top (schematic designator C73)
C74 "low ESR" PanasonicE 10900,8580 r0 top
C75 "T494B476M010AS" TC3528-1411 11060,7960 r0 top
C76 "Cap" CC1608-0603 10680,6688.25 r270 bottom
C77 "low ESR" TC3528-1411 10280,6720 r270 top
C78 "T494B476M010AS" TC3528-1411 10740,7960 r180 top
C79 "" PanasonicE 10240,11080 r90 top
C80 "" PanasonicE 10240,11840 r90 top
C81 "Cap Pol1" TC3528-1411 7760,9020 r90 top
C82 "Cap" CC1608-0603 7460,8808.25 r270 bottom
C83 "Cap" CC1608-0603 7620,8808.25 r270 bottom
C84 "Cap" CC1608-0603 8080,8771.75 r90 bottom
C85 "Cap" CC1608-0603 7460,8991.75 r90 bottom
C86 "Cap" CC1608-0603 7968.25,8680 r180 bottom
C87 "Cap Pol1" TC3528-1411 7700,8660 r180 top
C88 "Cap" CC1608-0603 7460,8640 r180 top
C89 "Cap Pol1" TC3528-1411 8100,8420 r90 top
C90 "Cap" CC1608-0603 7740,8268.25 r270 bottom
C91 "Cap" CC1608-0603 7900,8288.25 r270 bottom
C92 "Cap" CC1608-0603 7740,8431.75 r90 bottom
J1 "XLR connector" NC3FAH-0 2060,12300 r90 top
J2 "Vertical BNC" "Vertical BNC 227699-1" 6820,11680 r0 top
J3 "Vertical BNC" "Vertical BNC 227699-1" 3560,11700 r0 top
J4 "Vertical BNC" "Vertical BNC 227699-1" 4380,11720 r0 top
J5 "Vertical BNC" "Vertical BNC 227699-1" 5260,11720 r0 top
J6 "XLR connector" NC3FAH-0 2060,10800 r90 top
J7 "Vertical BNC" "Vertical BNC 227699-1" 6760,10180 r0 top
J8 "Vertical BNC" "Vertical BNC 227699-1" 4380,10240 r0 top
J9 "Vertical BNC" "Vertical BNC 227699-1" 5260,10260 r0 top
J10 "Vertical BNC" "Vertical BNC 227699-1" 3480,10220 r0 top
J11 "XLR connector" NC3FAH-0 2060,9300 r90 top
J12 "Vertical BNC" "Vertical BNC 227699-1" 6760,8640 r0 top
J13 "Vertical BNC" "Vertical BNC 227699-1" 4380,8740 r0 top
J14 "Vertical BNC" "Vertical BNC 227699-1" 5280,8740 r0 top
J15 "Vertical BNC" "Vertical BNC 227699-1" 3520,8740 r0 top
J16 "XLR connector" NC3FAH-0 2060,7600 r90 top
J17 "Vertical BNC" "Vertical BNC 227699-1" 7180,7020 r0 top
J18 "Vertical BNC" "Vertical BNC 227699-1" 3440,7020 r0 top
J19 "Vertical BNC" "Vertical BNC 227699-1" 4420,7040 r0 top
J20 "Vertical BNC" "Vertical BNC 227699-1" 5440,7060 r0 top
J21 "XLR connector" NC3FAH-0 2060,6100 r90 top
J22 "Vertical BNC" "Vertical BNC 227699-1" 7240,5500 r0 top
J23 "Vertical BNC" "Vertical BNC 227699-1" 4580,5540 r0 top
J24 "Vertical BNC" "Vertical BNC 227699-1" 5720,5500 r0 top
J25 "Vertical BNC" "Vertical BNC 227699-1" 3500,5500 r0 top
J26 "XLR connector" NC3FAH-0 2060,4600 r90 top
J27 "Vertical BNC" "Vertical BNC 227699-1" 7360,3800 r0 top
J28 "Vertical BNC" "Vertical BNC 227699-1" 4640,3940 r0 top
J29 "Vertical BNC" "Vertical BNC 227699-1" 5540,3960 r0 top
J30 "Vertical BNC" "Vertical BNC 227699-1" 3700,3940 r0 top
JP1:A21 "Header 2" HDR1X2 6245,7460 r90 top (schematic designator JP1)
JP1:A22 "Header 2" HDR1X2 6320,5960 r90 top (schematic designator JP1)
JP1:A23 "Header 2" HDR1X2 6320,4460 r90 top (schematic designator JP1)
JP2:A21 "Header 2" HDR1X2 6425,7460 r90 top (schematic designator JP2)
JP2:A22 "Header 2" HDR1X2 6500,5960 r90 top (schematic designator JP2)
JP2:A23 "Header 2" HDR1X2 6500,4460 r90 top (schematic designator JP2)
JP3:A21 "Header 2" HDR1X2 6925,7460 r180 top (schematic designator JP3)
JP3:A22 "Header 2" HDR1X2 7000,5960 r180 top (schematic designator JP3)
JP3:A23 "Header 2" HDR1X2 7000,4460 r180 top (schematic designator JP3)
JP4:A21 "Header 2" HDR1X2 7245,7460 r180 top (schematic designator JP4)
JP4:A22 "Header 2" HDR1X2 7320,5960 r180 top (schematic designator JP4)
JP4:A23 "Header 2" HDR1X2 7320,4460 r180 top (schematic designator JP4)
JP5:A21 "Header 3" HDR1X3 7460,7460 r90 top (schematic designator JP5)
JP5:A22 "Header 3" HDR1X3 7540,5960 r90 top (schematic designator JP5)
JP5:A23 "Header 3" HDR1X3 7540,4460 r90 top (schematic designator JP5)
JP6 "Header 7X2" HDR2x7-2mm 11860,7220 r0 top
JP7:H1 "Header 2" HDR1X2 4660,12660 r0 top (schematic designator JP7)
JP7:H2 "Header 2" HDR1X2 4675,7960 r0 top (schematic designator JP7)
JP8:HF1 "Header 2" HDR1X2 4400,11140 r0 top (schematic designator JP8)
JP8:HF2 "Header 2" HDR1X2 4410,6440 r0 top (schematic designator JP8)
JP9:PGA1 "Header 3X2" HDR2X3 5505,10900 r90 top (schematic designator JP9)
JP9:PGA2 "Header 3X2" HDR2X3 5445,9400 r90 top (schematic designator JP9)
JP9:PGA3 "Header 3X2" HDR2X3 5600,12400 r90 top (schematic designator JP9)
JP9:PGA4 "Header 3X2" HDR2X3 5600,6200 r90 top (schematic designator JP9)
JP9:PGA5 "Header 3X2" HDR2X3 5600,4700 r90 top (schematic designator JP9)
JP9:PGA6 "Header 3X2" HDR2X3 5630,7700 r90 top (schematic designator JP9)
L1 "DUAL LED" "LUMEX DUAL RT-ANG LED" 11760,6760 r90 top
L2 "Inductor 28F0121-1SR" STEWARD_1SR 10880,11220 r180 top
L3 "Inductor 28F0121-1SR" STEWARD_1SR 10880,11700 r180 top
O1 "SG-636PCE 32.0000MC0" SG636PCE 10940,6560 r90 top
P1 "Header 10X2" HDR2X10 10460,8460 r180 top
POWER-A1 "Molex 39-30-3045" MJ4RTHR 11440,11560 r90 top
POWER-D1 "Molex 39-30-3045" MJ4RTHR 11440,8280 r90 top
R1:A21 "Res1" 0603 5985,7860 r180 top (schematic designator R1)
R1:A22 "Res1" 0603 6060,6360 r180 top (schematic designator R1)
R1:A23 "Res1" 0603 6060,4860 r180 top (schematic designator R1)
R2:A21 "Res1" 0603 6545,7800 r90 top (schematic designator R2)
R2:A22 "Res1" 0603 6620,6300 r90 top (schematic designator R2)
R2:A23 "Res1" 0603 6620,4800 r90 top (schematic designator R2)
R3:A21 "Res1" 0603 6885,7940 r180 top (schematic designator R3)
R3:A22 "Res1" 0603 6960,6440 r180 top (schematic designator R3)
R3:A23 "Res1" 0603 6960,4940 r180 top (schematic designator R3)
R4:A21 "Res1" 0603 7245,7780 r90 top (schematic designator R4)
R4:A22 "Res1" 0603 7320,6280 r90 top (schematic designator R4)
R4:A23 "Res1" 0603 7320,4780 r90 top (schematic designator R4)
R5:A21 "Res1" 0603 5945,7740 r0 top (schematic designator R5)
R5:A22 "Res1" 0603 6020,6240 r0 top (schematic designator R5)
R5:A23 "Res1" 0603 6020,4740 r0 top (schematic designator R5)
R6:A21 "Res1" 0603 6145,7740 r0 top (schematic designator R6)
R6:A22 "Res1" 0603 6220,6240 r0 top (schematic designator R6)
R6:A23 "Res1" 0603 6220,4740 r0 top (schematic designator R6)
R7:A21 "Res1" 0603 6365,7900 r0 top (schematic designator R7)
R7:A22 "Res1" 0603 6440,6400 r0 top (schematic designator R7)
R7:A23 "Res1" 0603 6440,4900 r0 top (schematic designator R7)
R8:A21 "Res1" 0603 6485,7900 r270 top (schematic designator R8)
R8:A22 "Res1" 0603 6560,6400 r270 top (schematic designator R8)
R8:A23 "Res1" 0603 6560,4900 r270 top (schematic designator R8)
R9:A21 "Res1" 0603 6805,7640 r0 top (schematic designator R9)
R9:A22 "Res1" 0603 6880,6140 r0 top (schematic designator R9)
R9:A23 "Res1" 0603 6880,4640 r0 top (schematic designator R9)
R10:A21 "Res1" 0603 6805,7720 r0 top (schematic designator R10)
R10:A22 "Res1" 0603 6880,6220 r0 top (schematic designator R10)
R10:A23 "Res1" 0603 6880,4720 r0 top (schematic designator R10)
R11:A21 "Res1" 0603 7065,7940 r0 top (schematic designator R11)
R11:A22 "Res1" 0603 7140,6440 r0 top (schematic designator R11)
R11:A23 "Res1" 0603 7140,4940 r0 top (schematic designator R11)
R12:A21 "Res1" 0603 7185,7880 r270 top (schematic designator R12)
R12:A22 "Res1" 0603 7260,6380 r270 top (schematic designator R12)
R12:A23 "Res1" 0603 7260,4880 r270 top (schematic designator R12)
R13:A11 "Res1" CC1608-0603 6055,10660 r180 top (schematic designator R13)
R13:A12 "Res1" CC1608-0603 6055,9155 r180 top (schematic designator R13)
R13:A13 "Res1" CC1608-0603 6060,12160 r180 top (schematic designator R13)
R14:A11 "Res1" CC1608-0603 6135,11220 r180 top (schematic designator R14)
R14:A12 "Res1" CC1608-0603 6135,9715 r180 top (schematic designator R14)
R14:A13 "Res1" CC1608-0603 6140,12720 r180 top (schematic designator R14)
R15:A11 "Res1" CC1608-0603 6735,11080 r180 top (schematic designator R15)
R15:A12 "Res1" CC1608-0603 6735,9575 r180 top (schematic designator R15)
R15:A13 "Res1" CC1608-0603 6740,12580 r180 top (schematic designator R15)
R16:A11 "Res1" CC1608-0603 6675,10600 r0 top (schematic designator R16)
R16:A12 "Res1" CC1608-0603 6675,9095 r0 top (schematic designator R16)
R16:A13 "Res1" CC1608-0603 6680,12100 r0 top (schematic designator R16)
R17:A11 "Res1" CC1608-0603 5875,10900 r0 top (schematic designator R17)
R17:A12 "Res1" CC1608-0603 5875,9395 r0 top (schematic designator R17)
R17:A13 "Res1" CC1608-0603 5880,12400 r0 top (schematic designator R17)
R18:A11 "Res1" CC1608-0603 6055,10900 r0 top (schematic designator R18)
R18:A12 "Res1" CC1608-0603 6055,9395 r0 top (schematic designator R18)
R18:A13 "Res1" CC1608-0603 6060,12400 r0 top (schematic designator R18)
R19:A11 "Res1" CC1608-0603 6095,11020 r180 top (schematic designator R19)
R19:A12 "Res1" CC1608-0603 6095,9515 r180 top (schematic designator R19)
R19:A13 "Res1" CC1608-0603 6100,12520 r180 top (schematic designator R19)
R20:A11 "Res1" CC1608-0603 6135,11120 r0 top (schematic designator R20)
R20:A12 "Res1" CC1608-0603 6135,9615 r0 top (schematic designator R20)
R20:A13 "Res1" CC1608-0603 6140,12620 r0 top (schematic designator R20)
R21:A11 "Res1" CC1608-0603 6455,11180 r270 top (schematic designator R21)
R21:A12 "Res1" CC1608-0603 6455,9675 r270 top (schematic designator R21)
R21:A13 "Res1" CC1608-0603 6460,12680 r270 top (schematic designator R21)
R22:A11 "Res1" CC1608-0603 6575,11180 r270 top (schematic designator R22)
R22:A12 "Res1" CC1608-0603 6575,9675 r270 top (schematic designator R22)
R22:A13 "Res1" CC1608-0603 6580,12680 r270 top (schematic designator R22)
R23:A11 "Res1" CC1608-0603 6755,10820 r270 top (schematic designator R23)
R23:A12 "Res1" CC1608-0603 6755,9315 r270 top (schematic designator R23)
R23:A13 "Res1" CC1608-0603 6760,12320 r270 top (schematic designator R23)
R24:A11 "Res1" CC1608-0603 6655,10820 r90 top (schematic designator R24)
R24:A12 "Res1" CC1608-0603 6655,9315 r90 top (schematic designator R24)
R24:A13 "Res1" CC1608-0603 6660,12320 r90 top (schematic designator R24)
R25:ADC1 "Res1" 0603 8080,9475 r0 top (schematic designator R25)
R25:ADC2 "Res1" 0603 8080,6990 r0 top (schematic designator R25)
R26 "Res1" CC1608-0603 9060,8300 r90 top
R27 "Res1" CC1608-0603 8860,8020 r0 top
R28 "Res1" CC1608-0603 8860,7920 r0 top
R29 "Res1" CC1608-0603 8860,7820 r0 top
R30 "Res1" CC1608-0603 11380,6660 r0 top
R31 "Res1" CC1608-0603 11380,6840 r0 top
R32 "Optional pull-up" CC1608-0603 11560,7720 r180 top
R33 "current-limiting series res" CC1608-0603 11280,7220 r180 top
R34 "current-limiting resistor" CC1608-0603 11080,7500 r180 top
R35 "current-limiting resistor" CC1608-0603 11560,7440 r270 top
R36 "Res1" CC1608-0603 11080,7400 r180 top
R37 "Res1" CC1608-0603 11080,7260 r180 top
R38:H1 "Res1" CC2012-0805 4000,12680 r180 top (schematic designator R38)
R38:H2 "Res1" CC2012-0805 4015,7980 r180 top (schematic designator R38)
R39:H1 "Res1" CC2012-0805 3840,12320 r90 top (schematic designator R39)
R39:H2 "Res1" CC2012-0805 3855,7620 r90 top (schematic designator R39)
R40:H1 "Res1" CC2012-0805 4480,12620 r90 top (schematic designator R40)
R40:H2 "Res1" CC2012-0805 4495,7920 r90 top (schematic designator R40)
R41:HF1 "Res1" CC2012-0805 3600,10940 r0 top (schematic designator R41)
R41:HF2 "Res1" CC2012-0805 3610,6240 r0 top (schematic designator R41)
R42:HF1 "Res1" CC2012-0805 4200,11140 r0 top (schematic designator R42)
R42:HF2 "Res1" CC2012-0805 4210,6440 r0 top (schematic designator R42)
R43:HFS1 "Res1" CC2012-0805 3640,9500 r0 top (schematic designator R43)
R43:HFS2 "Res1" CC2012-0805 3630,4800 r0 top (schematic designator R43)
R44:IN1 "0.5%" R2012-0805 3080,10940 r270 top (schematic designator R44)
R44:IN2 "0.5%" R2012-0805 3080,12440 r270 top (schematic designator R44)
R44:IN3 "0.5%" R2012-0805 3080,9440 r270 top (schematic designator R44)
R44:IN4 "0.5%" R2012-0805 3080,6240 r270 top (schematic designator R44)
R44:IN5 "0.5%" R2012-0805 3080,7740 r270 top (schematic designator R44)
R44:IN6 "0.5%" R2012-0805 3080,4740 r270 top (schematic designator R44)
R45 "no inst" 1206 7560,11700 r0 top
R46 "no inst" 1206 7560,10900 r0 top
R47 "no inst" 1206 8320,9120 r270 top
R48 "no inst" 1206 7560,9360 r0 top
R49 "no inst" 1206 7940,7760 r0 top
R50 "no inst" 1206 7960,6340 r0 top
R51 "no inst" 1206 8280,7660 r90 top
R52 "no inst" 1206 7960,5120 r0 top
R53:PGA1 "Res1" CC2012-0805 5205,10860 r0 top (schematic designator R53)
R53:PGA2 "Res1" CC2012-0805 5145,9360 r0 top (schematic designator R53)
R53:PGA3 "Res1" CC2012-0805 5300,12360 r0 top (schematic designator R53)
R53:PGA4 "Res1" CC2012-0805 5300,6160 r0 top (schematic designator R53)
R53:PGA5 "Res1" CC2012-0805 5300,4660 r0 top (schematic designator R53)
R53:PGA6 "Res1" CC2012-0805 5330,7660 r0 top (schematic designator R53)
R54:PGA1 "Res1" CC2012-0805 5205,10960 r0 top (schematic designator R54)
R54:PGA2 "Res1" CC2012-0805 5145,9460 r0 top (schematic designator R54)
R54:PGA3 "Res1" CC2012-0805 5300,12460 r0 top (schematic designator R54)
R54:PGA4 "Res1" CC2012-0805 5300,6260 r0 top (schematic designator R54)
R54:PGA5 "Res1" CC2012-0805 5300,4760 r0 top (schematic designator R54)
R54:PGA6 "Res1" CC2012-0805 5330,7760 r0 top (schematic designator R54)
R55:PGA1 "Res1" CC2012-0805 5185,11100 r0 top (schematic designator R55)
R55:PGA2 "Res1" CC2012-0805 5125,9600 r0 top (schematic designator R55)
R55:PGA3 "Res1" CC2012-0805 5280,12600 r0 top (schematic designator R55)
R55:PGA4 "Res1" CC2012-0805 5280,6400 r0 top (schematic designator R55)
R55:PGA5 "Res1" CC2012-0805 5280,4900 r0 top (schematic designator R55)
R55:PGA6 "Res1" CC2012-0805 5310,7900 r0 top (schematic designator R55)
R56 "0.1% 25 ppm/C" CC1608-0603 7920,8960 r180 top
R57 "LPF resistor" CC1608-0603 7800,8800 r90 top
R58 "0.1% 25 ppm/C" CC1608-0603 7920,9080 r0 top
U1:A21 "AD8028ARM" TSSO3x5-G10 6365,7740 r270 top (schematic designator U1)
U1:A22 "AD8028ARM" TSSO3x5-G10 6440,6240 r270 top (schematic designator U1)
U1:A23 "AD8028ARM" TSSO3x5-G10 6440,4740 r270 top (schematic designator U1)
U2:A21 "AD8028ARM" TSSO3x5-G10 7045,7720 r270 top (schematic designator U2)
U2:A22 "AD8028ARM" TSSO3x5-G10 7120,6220 r270 top (schematic designator U2)
U2:A23 "AD8028ARM" TSSO3x5-G10 7120,4720 r270 top (schematic designator U2)
U3:A11 "AD8513 AR" SO-G14 6395,10920 r0 top (schematic designator U3)
U3:A12 "AD8513 AR" SO-G14 6395,9415 r0 top (schematic designator U3)
U3:A13 "AD8513 AR" SO-G14 6400,12420 r0 top (schematic designator U3)
U5:ADC1 "AD7685BRM" "AD RM-10" 8400,9475 r270 top (schematic designator U5)
U5:ADC2 "AD7685BRM" "AD RM-10" 8400,6990 r270 top (schematic designator U5)
U6 "XC3S50-4VQ100C Spartan-3" "Xilinx TQ100" 10600,7400 r90 top locked
U7 "IL716-3" SO-G16/D10 9180,7940 r270 top
U8 "XCF01S" TSSO6x6-G20/X.3 11340,7460 r270 top
U9:H1 "OP1177" SO-G8/X.6 4060,12500 r270 top (schematic designator U9)
U9:H2 "OP1177" SO-G8/X.6 4075,7800 r270 top (schematic designator U9)
U10:H1 "S2 normally on" MSOP8 4420,12480 r0 top (schematic designator U10)
U10:H2 "S2 normally on" MSOP8 4435,7780 r0 top (schematic designator U10)
U11:HF1 "S2 normally on" MSOP8 4280,10900 r0 top (schematic designator U11)
U11:HF2 "S2 normally on" MSOP8 4290,6200 r0 top (schematic designator U11)
U12:HF1 "OP1177" SO-G8/X.6 3900,10880 r270 top (schematic designator U12)
U12:HF2 "OP1177" SO-G8/X.6 3910,6180 r270 top (schematic designator U12)
U13:HFS1 "OP1177" SO-G8/X.6 3980,9400 r270 top (schematic designator U13)
U13:HFS2 "OP1177" SO-G8/X.6 3970,4700 r270 top (schematic designator U13)
U14:IN1 "AD8221AR" SO-G8 3320,10940 r270 top (schematic designator U14)
U14:IN2 "AD8221AR" SO-G8 3320,12440 r270 top (schematic designator U14)
U14:IN3 "AD8221AR" SO-G8 3320,9440 r270 top (schematic designator U14)
U14:IN4 "AD8221AR" SO-G8 3320,6240 r270 top (schematic designator U14)
U14:IN5 "AD8221AR" SO-G8 3320,7740 r270 top (schematic designator U14)
U14:IN6 "AD8221AR" SO-G8 3320,4740 r270 top (schematic designator U14)
U15:PGA1 "LTC6910-1" TSOT-23-8 4865,11000 r0 top (schematic designator U15)
U15:PGA2 "LTC6910-1" TSOT-23-8 4805,9500 r0 top (schematic designator U15)
U15:PGA3 "LTC6910-1" TSOT-23-8 4960,12500 r0 top (schematic designator U15)
U15:PGA4 "LTC6910-1" TSOT-23-8 4960,6300 r0 top (schematic designator U15)
U15:PGA5 "LTC6910-1" TSOT-23-8 4960,4800 r0 top (schematic designator U15)
U15:PGA6 "LTC6910-1" TSOT-23-8 4990,7800 r0 top (schematic designator U15)
U16 "TPS70245PWP" "PWP PowerPad -20" 10900,8200 r270 top
U17 "TPS77525D" SO-G8 10580,6720 r90 top
U18 "MAX6126A21 2.048V" TSSO3x5-G8/X.35 7540,8840 r270 top
U19 "OP1177AR" TSSO3X5-G8/X.4 8000,8780 r270 top
U20 "MAX6126A21 2.048V" TSSO3x5-G8/X.35 7820,8320 r270 top

## Footprints (in the part's own frame and the unit in brackets; to place one, negate y for a bottom-side part, rotate by r counter-clockwise, add the part's x,y. Pads: shape width x height; smd on the part's side, far side on the other; paste and mask are expansions set on the pad)
0603 [mm] "Chip Capacitor; Body 1.6 x 0.8 mm (LxW typ)"
  rect 1.1x1 smd: 1(-0.85,0) 2(0.85,0)
  silkscreen extent -1.7,-0.4 -1.7,0.4
0805 [mm] "Chip Capacitor; Body 2.0 x 1.2 mm (LxW typ)"
  rect 1.3x1.5 smd: 1(-0.95,0) 2(0.95,0)
  silkscreen extent -1.9,-0.65 -1.9,0.65
1206 [mm] "Chip Capacitor; Body 3.2 x 1.6 mm (LxW typ)"
  rect 1.6x1.8 smd: 1(-1.4,0) 2(1.4,0)
  silkscreen extent -0.3,-0.8 0.3,0.8
"AD RM-10" [mm] "Shrink Small Outline; 10 Leads; Body Width 3 mm; Pitch 0.5 mm"
  rect 0.3x1.6 smd: 1(-1,-2.05) 2(-0.5,-2.05) 3(0,-2.05) 4(0.5,-2.05) 5(1,-2.05) 6(1,2.05) 7(0.5,2.05) 8(0,2.05) 9(-0.5,2.05) 10(-1,2.05)
  silkscreen extent -1.82,-2.17 1.58,0.85
CC1608-0603 [mm] "Chip Capacitor; Body 1.6 x 0.8 mm (LxW typ)"
  rect 1.1x1 smd: 1(-0.85,0) 2(0.85,0)
  silkscreen extent -1.7,-0.4 -1.7,0.4
CC2012-0805 [mm] "Chip Capacitor; Body 2.0 x 1.2 mm (LxW typ)"
  rect 1.3x1.5 smd: 1(-0.95,0) 2(0.95,0)
  silkscreen extent -1.9,-0.65 -1.9,0.65
CC3216-1206 [mm] "Chip Capacitor; Body 3.2 x 1.6 mm (LxW typ)"
  rect 1.6x1.8 smd: 1(-1.4,0) 2(1.4,0)
  silkscreen extent -0.3,-0.8 0.3,0.8
HDR1X2 [mm] "Connector; Header; 2 Position"
  rect 1.5x1.5 hole 0.9: 1(0,0)
  round 1.5 hole 0.9: 2(2.54,0)
  silkscreen extent -1.27,-1.27 3.81,1.27
HDR1X3 [mm] "Connector; Header; 3 Position"
  rect 1.5x1.5 hole 0.9: 1(0,0)
  round 1.5 hole 0.9: 2(2.54,0) 3(5.08,0)
  silkscreen extent -1.27,-1.27 6.35,1.27
HDR2X3 [mm] "Connector; Header; 3x2 Position"
  rect 1.5x1.5 hole 0.9: 1(0,0)
  round 1.5 hole 0.9: 2(0,2.54) 3(2.54,0) 4(2.54,2.54) 5(5.08,0) 6(5.08,2.54)
  silkscreen extent -1.27,-1.27 6.35,3.81
HDR2x7-2mm [mm]
  round 1.5 hole 1: 1(0,0) 2(-2,0) 3(0,2) 4(-2,2) 5(0,4) 6(-2,4) 7(0,6) 8(-2,6) 9(0,8) 10(-2,8) 11(0,10.033) 12(-2,10) 13(0,12) 14(-2,12)
  silkscreen extent -3.5,-1.5 1.5,13.5
HDR2X10 [mm] "Connector; Header; 10x2 Position"
  rect 1.5x1.5 hole 0.9: 1(0,0)
  round 1.5 hole 0.9: 2(0,2.54) 3(2.54,0) 4(2.54,2.54) 5(5.08,0) 6(5.08,2.54) 7(7.62,0) 8(7.62,2.54) 9(10.16,0) 10(10.16,2.54) 11(12.7,0) 12(12.7,2.54) 13(15.24,0) 14(15.24,2.54) 15(17.78,0) 16(17.78,2.54) 17(20.32,0) 18(20.32,2.54) 19(22.86,0) 20(22.86,2.54)
  silkscreen extent -1.27,-1.27 24.13,3.81
"LUMEX DUAL RT-ANG LED" [mil] "Lumex Dual Right-angle LED holder for part SSF-LXH2100XX"
  round 50 hole 35: 1(-175.2,0) 2(-75,0) 3(75,0) 4(175.2,0)
  silkscreen extent -246,-217 246,150
MJ4RTHR [mm]
  round 4 hole 3.2: 0(-8.4,-7.3) 0(4.2,-7.3)
  round 2.2 hole 1.8: 1(4.2,0) 2(0,0) 3(-4.2,0) 4(-8.4,0)
  silkscreen extent -11.1,-14.2 6.9,-1.9
MSOP8 [mm]
  rect 1.04x0.38 smd: 1(0,0)
  oval 1.04x0.38 smd: 2(0,-0.65) 3(0,-1.3) 4(0,-1.95) 5(4.24,-1.95) 6(4.24,-1.3) 7(4.24,-0.65) 8(4.24,0)
  silkscreen extent 1.26,-2.28 2.99,0.33
NC3FAH-0 [mil] "Neutrik 3 pole female XLR receptacle, plastic housing, horizontal PCB mount."
  round 75 hole 65: 0(-150,-150) 0(150,-350) 1(-150,-500) 2(150,-525)
  round 75 hole 50: 3(0,-675)
  silkscreen extent -500,-825 500,0
PanasonicE [mm]
  rect 3.6x0.8 smd: 1(3,0) 2(-3,0)
  silkscreen extent -4.6,-4.1 4.6,4.2
"PWP PowerPad -20" [mil]
  rect 60x15 smd: 1(-115,115) 2(-115,89.4) 3(-115,63.8) 4(-115,38.2) 5(-115,12.6) 6(-115,-13) 7(-115,-38.6) 8(-115,-64.2) 9(-115,-89.8) 10(-115,-115.4) 11(115,-115.4) 12(115,-89.8) 13(115,-64.2) 14(115,-38.6) 15(115,-13) 16(115,12.6) 17(115,38.2) 18(115,63.8) 19(115,89.4) 20(115,115)
  rect 62x101 smd paste+0 mask+0: P0(0,0)
  round 20 hole 18 mask-20: P1(40,105) P2(-40,105) P3(40,-100) P4(-40,-100)
  round 20 hole 13.5 mask-20: P5(-20,40) P6(-20,0) P7(-20,-40) P8(20,40) P9(20,0) P10(20,-40)
  rect 36x256 smd mask+0: P11(49,0) p12(-49,0)
  rect 62x77.5 smd mask+0: p16(0,-89) p17(0,89)
  silkscreen extent -75,-140 75,140
R2012-0805 [mm] "Thermistor; 2 Leads"
  rect 1.3x1.5 smd: 1(-0.95,0) 2(0.95,0)
  silkscreen extent -2,-1.15 2,1.15
SG636PCE [mm]
  rect 2.3x1.5 smd: 1(0,0) 4(0,-5.08) 5(4.6,-5.08) 8(4.6,0)
  silkscreen extent 0,-8.64 4.57,3.05
SO-G8 [mm] "Small Outline; 8 Leads; Body Width 3.9 mm; Pitch 1.27 mm"
  rect 0.6x2.2 smd: 1(-1.905,-2.6) 2(-0.635,-2.6) 3(0.635,-2.6) 4(1.905,-2.6) 5(1.905,2.6) 6(0.635,2.6) 7(-0.635,2.6) 8(-1.905,2.6)
  silkscreen extent -2.88,-2.72 2.5,1.1
SO-G8/X.6 [mm] "Small Outline; 8 Leads; Body Width 3.9 mm; Pitch 1.27 mm"
  rect 0.6x1.55 smd: 1(-1.905,-2.925) 2(-0.635,-2.925) 3(0.635,-2.925) 4(1.905,-2.925) 5(1.905,2.925) 6(0.635,2.925) 7(-0.635,2.925) 8(-1.905,2.925)
  silkscreen extent -2.88,-3.05 2.5,1.75
SO-G14 [mm] "Small Outline; 14 Leads; Body Width 4 mm; Pitch 1.27 mm"
  rect 0.6x2.2 smd: 1(-3.81,-2.6) 2(-2.54,-2.6) 3(-1.27,-2.6) 4(0,-2.6) 5(1.27,-2.6) 6(2.54,-2.6) 7(3.81,-2.6) 8(3.81,2.6) 9(2.54,2.6) 10(1.27,2.6) 11(0,2.6) 12(-1.27,2.6) 13(-2.54,2.6) 14(-3.81,2.6)
  silkscreen extent -4.78,-2.72 4.37,1.1
SO-G16/D10 [mm] "Small Outline; 16 Leads; Body Width 3.9 mm; Pitch 1.27 mm"
  rect 0.6x2.05 smd: 1(-4.445,-2.675) 2(-3.175,-2.675) 3(-1.905,-2.675) 4(-0.635,-2.675) 5(0.635,-2.675) 6(1.905,-2.675) 7(3.175,-2.675) 8(4.445,-2.675) 9(4.445,2.675) 10(3.175,2.675) 11(1.905,2.675) 12(0.635,2.675) 13(-0.635,2.675) 14(-1.905,2.675) 15(-3.175,2.675) 16(-4.445,2.675)
  silkscreen extent -5.42,-2.8 5,1.25
STEWARD_1SR [mil]
  rect 124x136 smd: 1(-169,0) 2(169,0)
  silkscreen extent -263,-100 263,100
TC3216-1206 [mm] "Capacitor, SM Tantalum; Body 3.2 x 1.6 mm (LxW typ)"
  rect 2x1.2 smd: 1(-1.4,0) 2(1.4,0)
  silkscreen extent -1.7,-0.9 1.7,0.9
TC3528-1411 [mm] "Capacitor, SM Tantalum; Body 3.5 x 2.8 mm (LxW typ)"
  rect 2x2.2 smd: 1(-1.5,0) 2(1.5,0)
  silkscreen extent -2.82,-1.5 1.85,1.62
TSOT-23-8 [mm]
  rect 1.22x0.43 smd: 1(0,0)
  oval 1.22x0.43 smd: 2(0,-0.65) 3(0,-1.3) 4(0,-1.95) 5(2.62,-1.95) 6(2.62,-1.3) 7(2.62,-0.65) 8(2.62,0)
  silkscreen extent 0.9,-2.35 1.75,0.25
TSSO3X5-G8/X.4 [mm] "Shrink Small Outline; 8 Leads; Body Width 3 mm; Pitch 0.65 mm"
  rect 0.4x1.55 smd: 1(-0.975,-2.075) 2(-0.325,-2.075) 3(0.325,-2.075) 4(0.975,-2.075) 5(0.975,2.075) 6(0.325,2.075) 7(-0.325,2.075) 8(-0.975,2.075)
  silkscreen extent -1.85,-2.2 1.55,0.9
TSSO3x5-G8/X.35 [mm] "Shrink Small Outline; 8 Leads; Body Width 3 mm; Pitch 0.65 mm"
  rect 0.35x1.5 smd: 1(-0.975,-2.075) 2(-0.325,-2.075) 3(0.325,-2.075) 4(0.975,-2.075) 5(0.975,2.075) 6(0.325,2.075) 7(-0.325,2.075) 8(-0.975,2.075)
  silkscreen extent -1.82,-2.2 1.53,0.93
TSSO3x5-G10 [mm] "Shrink Small Outline; 10 Leads; Body Width 3 mm; Pitch 0.5 mm"
  rect 0.3x1.6 smd: 1(-1,-2.05) 2(-0.5,-2.05) 3(0,-2.05) 4(0.5,-2.05) 5(1,-2.05) 6(1,2.05) 7(0.5,2.05) 8(0,2.05) 9(-0.5,2.05) 10(-1,2.05)
  silkscreen extent -1.82,-2.17 1.58,0.85
TSSO6x6-G20/X.3 [mm] "Shrink Small Outline; 20 Leads; Body Width 4.4 mm; Pitch 0.65 mm"
  rect 0.3x1.45 smd: 1(-2.925,-2.825) 2(-2.275,-2.825) 3(-1.625,-2.825) 4(-0.975,-2.825) 5(-0.325,-2.825) 6(0.325,-2.825) 7(0.975,-2.825) 8(1.625,-2.825) 9(2.275,-2.825) 10(2.925,-2.825) 11(2.925,2.825) 12(2.275,2.825) 13(1.625,2.825) 14(0.975,2.825) 15(0.325,2.825) 16(-0.325,2.825) 17(-0.975,2.825) 18(-1.625,2.825) 19(-2.275,2.825) 20(-2.925,2.825)
  silkscreen extent -3.75,-2.95 3.3,1.7
"Vertical BNC 227699-1" [mil] "AMP vertical BNC 227699-1"
  round 70 hole 52: 1(0,0) 2(250,250) 3(-250,250) 4(-250,-250) 5(250,-250)
  silkscreen extent -345,-345 345,345